# EAGLE board SparkX_smol_Power_AAA-Panel (EAGLE 9.6.2), part 1 of 13
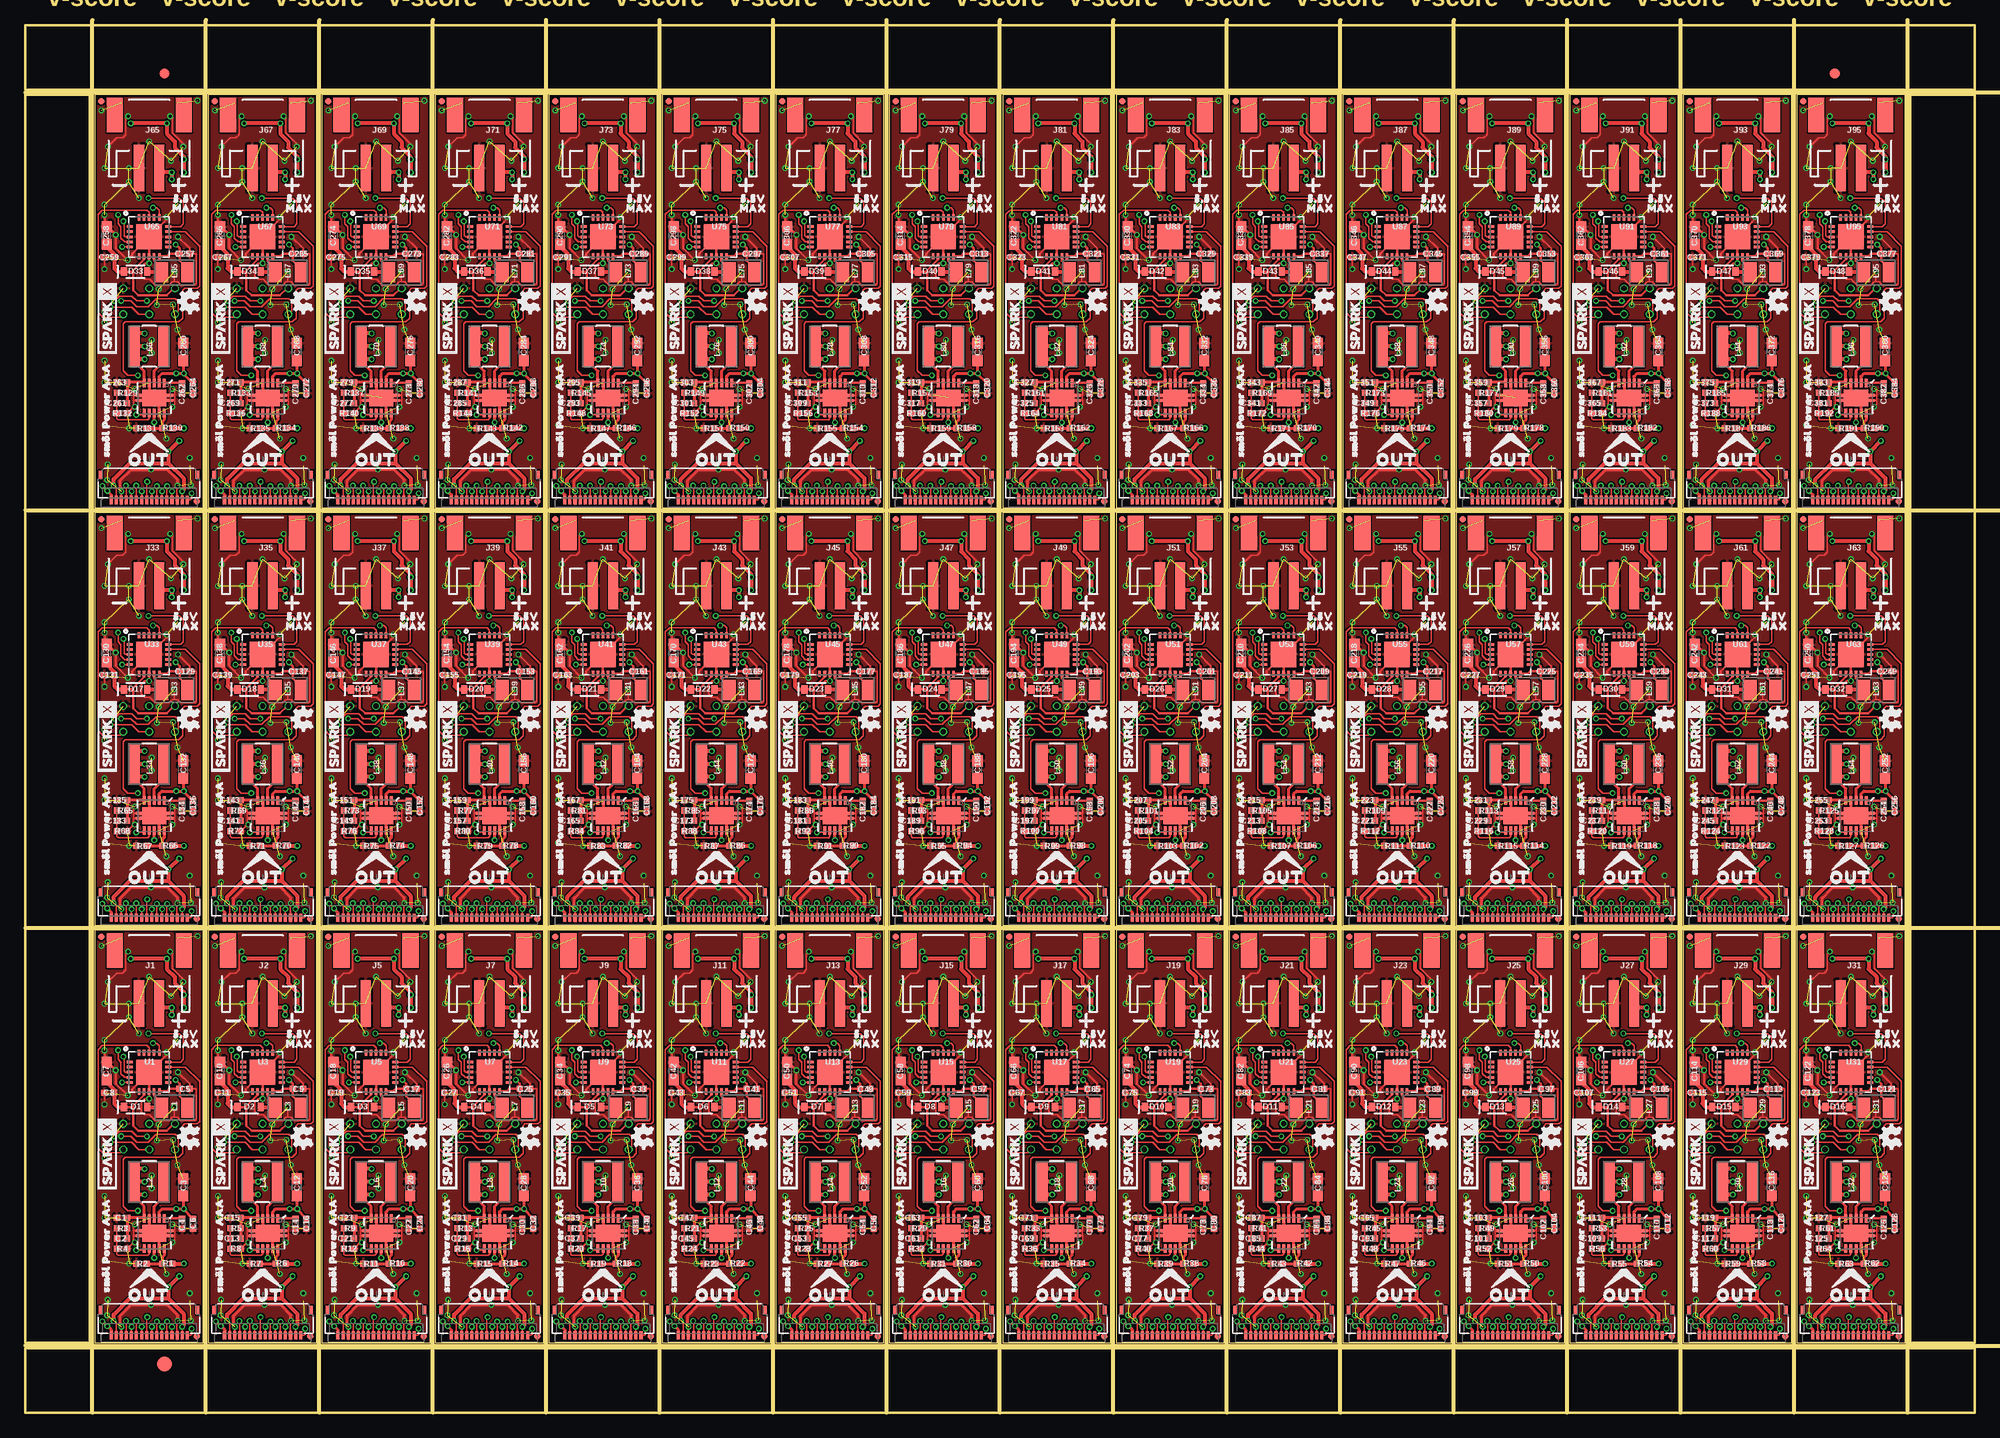
[diagram p0: board, top side]
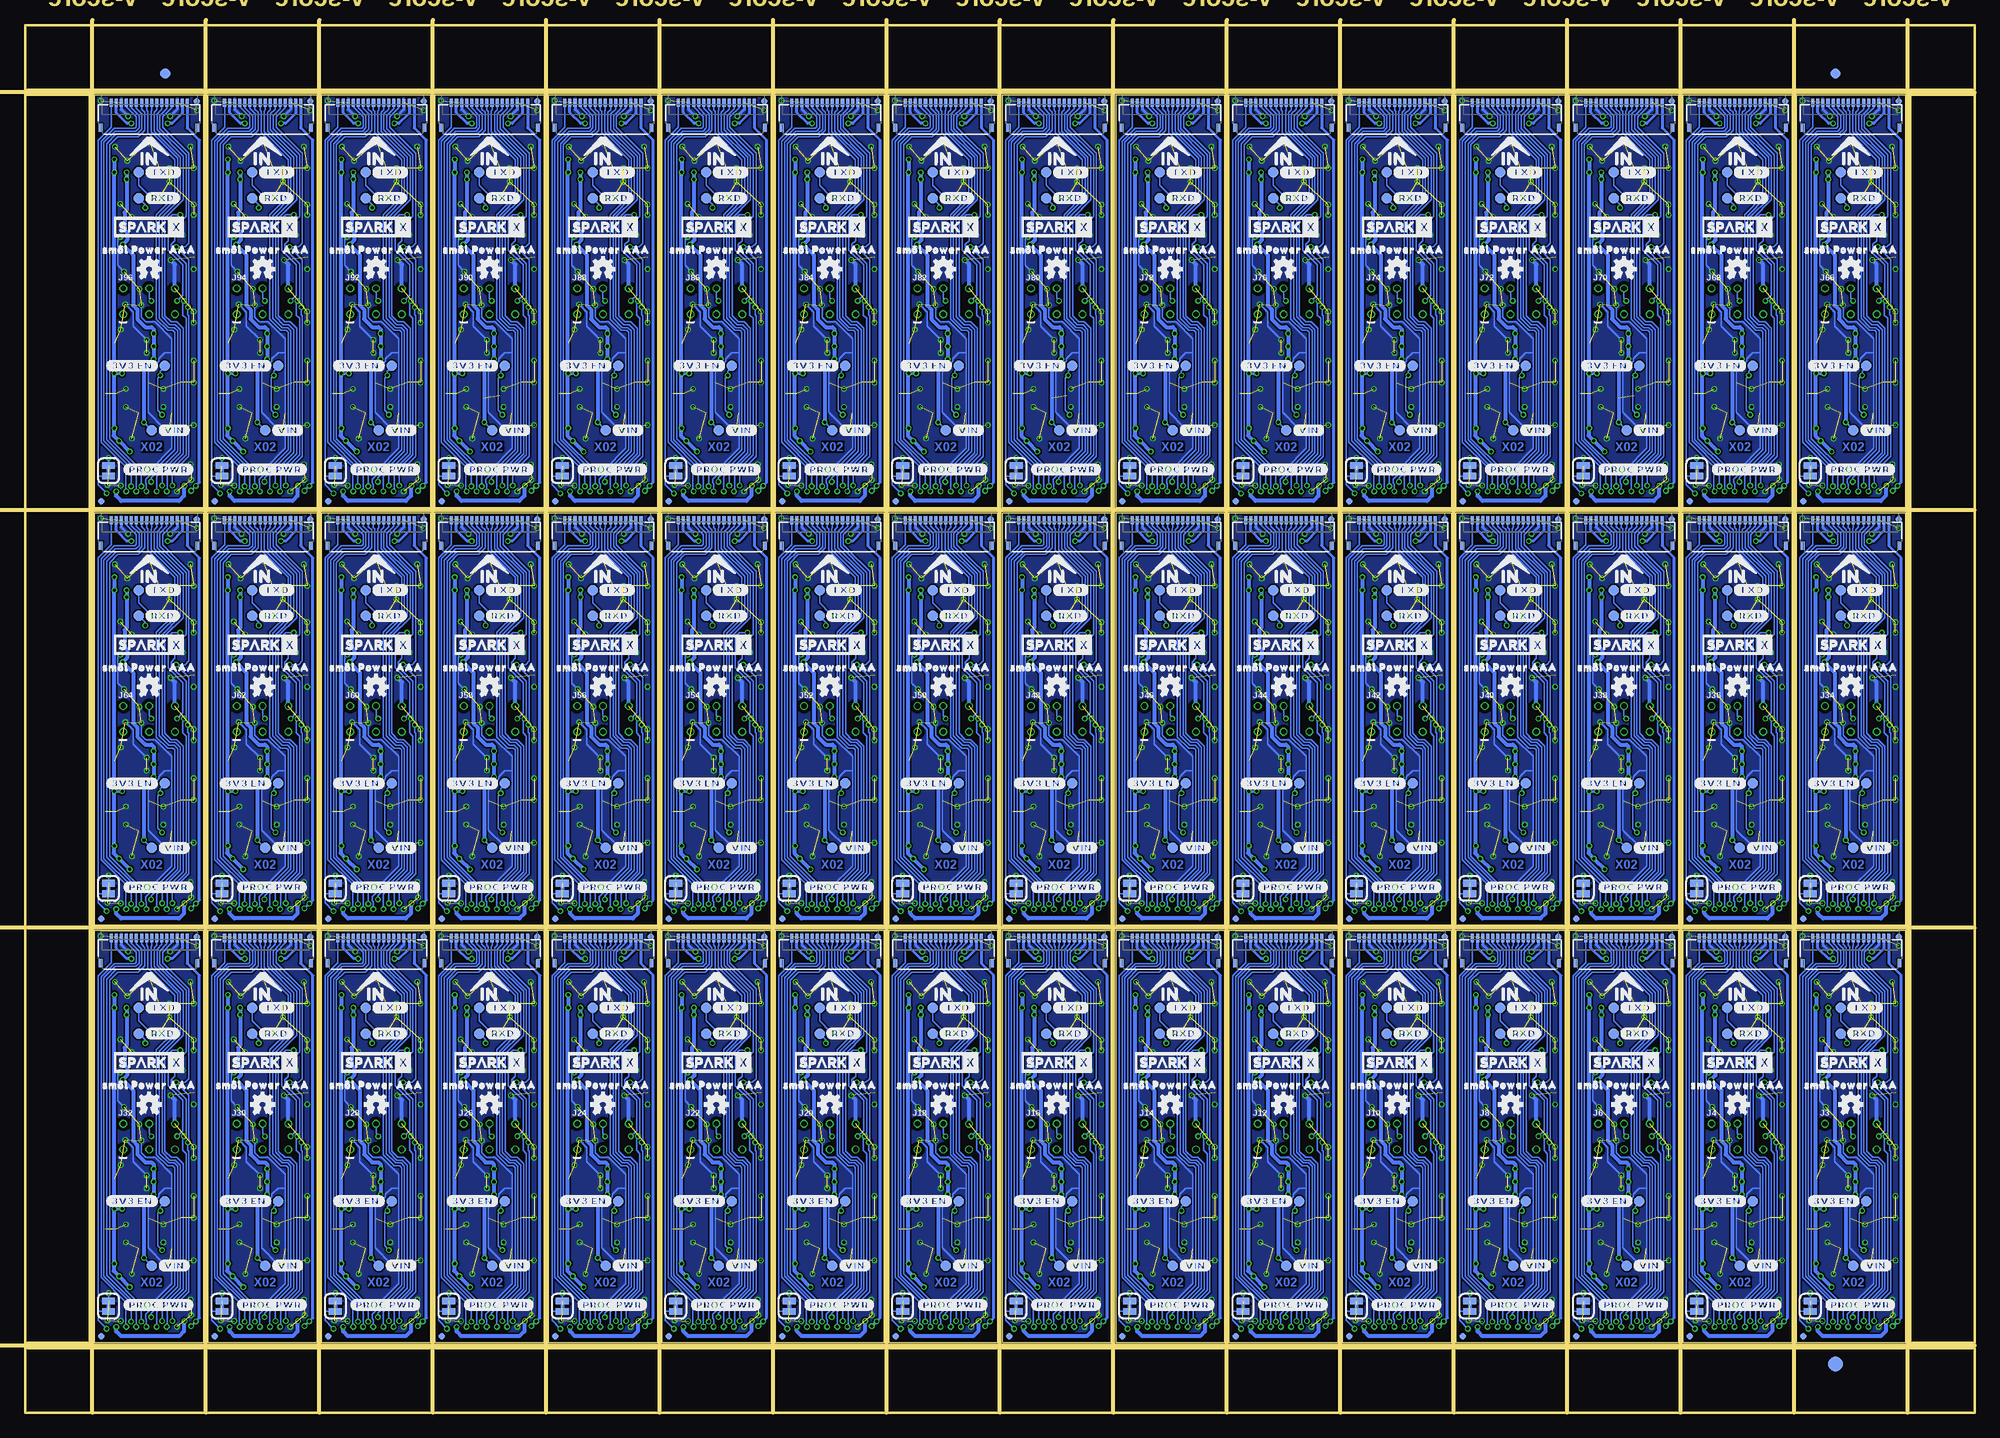
[diagram p1: board, bottom side, seen from below]

Size 192.02 x 136.65 mm. Coordinates in mm from the lower left corner, seen from the top.
Outline: 208 segments
Copper layers (1*16): Top 0.035mm / dielectric 1.5mm / Bottom 0.035mm
Design rules "SparkX_smol_Power_AAA": minimum track width 5mil, minimum drill 0.3mm, track to track 5mil, track to pad 5mil, pad to pad 5mil, via to via 5mil, smd to smd 5mil, copper to edge 7mil, drill to drill 7mil, minimum pad ring 5mil, minimum via ring 5mil, stop-mask expansion 2.5mil, vias tented up to drill 25mil, thermal gap 10mil
bRestrict: area 9.1,27.9 to 10.2,29; area 11.7,27.9 to 12.7,29; area 14.2,27.9 to 15.2,29; area 14.2,25.4 to 15.2,26.4; area 11.7,25.4 to 12.7,26.4; area 9.1,25.4 to 10.2,26.4; area 20.3,27.9 to 21.3,29; area 22.9,27.9 to 23.9,29; area 25.4,27.9 to 26.4,29; area 25.4,25.4 to 26.4,26.4; area 22.9,25.4 to 23.9,26.4; area 20.3,25.4 to 21.3,26.4; 276 more areas
Milling: 21 lines

## Footprints (pad centres in the part's own frame; a part is rotated, then mirrored left to right if it is on the bottom)
PAD.03X.04 = smd 1.016 x 1.016: 1 0,0
0402-TIGHT = smd 0.6 x 0.6: 1 -0.5,0; 2 0.5,0
0603 = smd 1.1 x 1: 1 -0.85,0; 2 0.85,0
SOD-323 = smd 0.63 x 0.83: A 1.15,0; C -1.15,0
FIDUCIAL-1X2 = smd 1 x 1: 1 0,0
FIDUCIAL-1.5X3 = smd 1.5 x 1.5: 1 0,0
FIDUCIAL-MICRO = smd 0.635 x 0.635: 1 0,0
FPC_16_0.5MM = smd 0.3 x 0.8: 1 -3.75,1.35; 2 -3.25,1.35; 3 -2.75,1.35; 4 -2.25,1.35; 5 -1.75,1.35; 6 -1.25,1.35; 7 -0.75,1.35; 8 -0.25,1.35; 9 0.25,1.35; 10 0.75,1.35; 11 1.25,1.35; 12 1.75,1.35; 13 2.25,1.35; 14 2.75,1.35; 15 3.25,1.35; 16 3.75,1.35 | smd 0.4 x 0.8: MP1 -4.75,-1.15; MP2 4.75,-1.15
JST-2-SMD = smd 1 x 4.6: 1 -1,-3.7; 2 1,-3.7 | smd 1.6 x 3.4: NC1 -3.4,1.5; NC2 3.4,1.5
2X3_TEST_POINTS = drill 0.508: 1 -2.54,-1.27; 2 -2.54,1.27; 3 0,-1.27; 4 0,1.27; 5 2.54,-1.27; 6 2.54,1.27
INDUCTOR_LQH32 = smd 2 x 1.25: P$1 -0.07,1.205; P$2 -0.07,-1.295
INDUCTOR_4X4MM = smd 4.089 x 1.143: P$1 0,1.473; P$2 0,-1.473
SMT-JUMPER_2_NC_TRACE_SILK = smd 0.66 x 1.27: 1 -0.521,0; 2 0.521,0
QFN20_20M1 = smd 0.6 x 0.25: 1 -1.9,1; 2 -1.9,0.5; 3 -1.9,0; 4 -1.9,-0.5; 5 -1.9,-1; 11 1.9,-1; 12 1.9,-0.5; 13 1.9,0; 14 1.9,0.5; 15 1.9,1 | smd 0.25 x 0.6: 6 -1,-1.9; 7 -0.5,-1.9; 8 0,-1.9; 9 0.5,-1.9; 10 1,-1.9; 16 1,1.9; 17 0.5,1.9; 18 0,1.9; 19 -0.5,1.9; 20 -1,1.9 | smd 2.5 x 2.5: PAD 0,0
QFN-10_PAD = smd 0.297 x 0.85: 1 -1,-1.475; 2 -0.5,-1.475; 3 0,-1.475; 4 0.5,-1.475; 5 1,-1.475; 6 1,1.475; 7 0.5,1.475; 8 0,1.475; 9 -0.5,1.475; 10 -1,1.475 | smd 0.7 x 0.28: 11 -1.5,0.25; 12 -1.5,-0.25; 13 1.5,0.25; 14 1.5,-0.25 | smd 2.4 x 1.65: 15 0,0

## Placement (x,y rotation side)
3V3_EN  TEST-POINT3X4  [PAD.03X.04]  10.67,20.83 0 bottom
3V3_EN1  TEST-POINT3X4  [PAD.03X.04]  21.84,20.83 0 bottom
3V3_EN2  TEST-POINT3X4  [PAD.03X.04]  33.02,20.83 0 bottom
3V3_EN3  TEST-POINT3X4  [PAD.03X.04]  44.2,20.83 0 bottom
3V3_EN4  TEST-POINT3X4  [PAD.03X.04]  55.37,20.83 0 bottom
3V3_EN5  TEST-POINT3X4  [PAD.03X.04]  66.55,20.83 0 bottom
3V3_EN6  TEST-POINT3X4  [PAD.03X.04]  77.72,20.83 0 bottom
3V3_EN7  TEST-POINT3X4  [PAD.03X.04]  88.9,20.83 0 bottom
3V3_EN8  TEST-POINT3X4  [PAD.03X.04]  100.08,20.83 0 bottom
3V3_EN9  TEST-POINT3X4  [PAD.03X.04]  111.25,20.83 0 bottom
3V3_EN10  TEST-POINT3X4  [PAD.03X.04]  122.43,20.83 0 bottom
3V3_EN11  TEST-POINT3X4  [PAD.03X.04]  133.6,20.83 0 bottom
3V3_EN12  TEST-POINT3X4  [PAD.03X.04]  144.78,20.83 0 bottom
3V3_EN13  TEST-POINT3X4  [PAD.03X.04]  155.96,20.83 0 bottom
3V3_EN14  TEST-POINT3X4  [PAD.03X.04]  167.13,20.83 0 bottom
3V3_EN15  TEST-POINT3X4  [PAD.03X.04]  178.31,20.83 0 bottom
3V3_EN16  TEST-POINT3X4  [PAD.03X.04]  10.67,61.98 0 bottom
3V3_EN17  TEST-POINT3X4  [PAD.03X.04]  21.84,61.98 0 bottom
3V3_EN18  TEST-POINT3X4  [PAD.03X.04]  33.02,61.98 0 bottom
3V3_EN19  TEST-POINT3X4  [PAD.03X.04]  44.2,61.98 0 bottom
3V3_EN20  TEST-POINT3X4  [PAD.03X.04]  55.37,61.98 0 bottom
3V3_EN21  TEST-POINT3X4  [PAD.03X.04]  66.55,61.98 0 bottom
3V3_EN22  TEST-POINT3X4  [PAD.03X.04]  77.72,61.98 0 bottom
3V3_EN23  TEST-POINT3X4  [PAD.03X.04]  88.9,61.98 0 bottom
3V3_EN24  TEST-POINT3X4  [PAD.03X.04]  100.08,61.98 0 bottom
3V3_EN25  TEST-POINT3X4  [PAD.03X.04]  111.25,61.98 0 bottom
3V3_EN26  TEST-POINT3X4  [PAD.03X.04]  122.43,61.98 0 bottom
3V3_EN27  TEST-POINT3X4  [PAD.03X.04]  133.6,61.98 0 bottom
3V3_EN28  TEST-POINT3X4  [PAD.03X.04]  144.78,61.98 0 bottom
3V3_EN29  TEST-POINT3X4  [PAD.03X.04]  155.96,61.98 0 bottom
3V3_EN30  TEST-POINT3X4  [PAD.03X.04]  167.13,61.98 0 bottom
3V3_EN31  TEST-POINT3X4  [PAD.03X.04]  178.31,61.98 0 bottom
3V3_EN32  TEST-POINT3X4  [PAD.03X.04]  10.67,103.12 0 bottom
3V3_EN33  TEST-POINT3X4  [PAD.03X.04]  21.84,103.12 0 bottom
3V3_EN34  TEST-POINT3X4  [PAD.03X.04]  33.02,103.12 0 bottom
3V3_EN35  TEST-POINT3X4  [PAD.03X.04]  44.2,103.12 0 bottom
3V3_EN36  TEST-POINT3X4  [PAD.03X.04]  55.37,103.12 0 bottom
3V3_EN37  TEST-POINT3X4  [PAD.03X.04]  66.55,103.12 0 bottom
3V3_EN38  TEST-POINT3X4  [PAD.03X.04]  77.72,103.12 0 bottom
3V3_EN39  TEST-POINT3X4  [PAD.03X.04]  88.9,103.12 0 bottom
3V3_EN40  TEST-POINT3X4  [PAD.03X.04]  100.08,103.12 0 bottom
3V3_EN41  TEST-POINT3X4  [PAD.03X.04]  111.25,103.12 0 bottom
3V3_EN42  TEST-POINT3X4  [PAD.03X.04]  122.43,103.12 0 bottom
3V3_EN43  TEST-POINT3X4  [PAD.03X.04]  133.6,103.12 0 bottom
3V3_EN44  TEST-POINT3X4  [PAD.03X.04]  144.78,103.12 0 bottom
3V3_EN45  TEST-POINT3X4  [PAD.03X.04]  155.96,103.12 0 bottom
3V3_EN46  TEST-POINT3X4  [PAD.03X.04]  167.13,103.12 0 bottom
3V3_EN47  TEST-POINT3X4  [PAD.03X.04]  178.31,103.12 0 bottom
C1  10uF  [0402-TIGHT]  9.52,19.18 180 top
C2  0.1uF  [0402-TIGHT]  9.52,17.14 180 top
C3  22uF  [0603]  15.56,22.19 90 top
C4  0.1uF  [0402-TIGHT]  15.43,18.61 270 top
C5  4.7uF  [0402-TIGHT]  15.68,31.88 0 top
C6  0.1uF  [0402-TIGHT]  16.51,18.61 270 top
C7  22uF  [0603]  8,33.66 90 top
C8  0.1uF  [0402-TIGHT]  8.25,31.5 180 top
C9  4.7uF  [0402-TIGHT]  26.86,31.88 0 top
C10  22uF  [0603]  19.18,33.66 90 top
C11  0.1uF  [0402-TIGHT]  19.43,31.5 180 top
C12  22uF  [0603]  26.73,22.19 90 top
C13  0.1uF  [0402-TIGHT]  20.7,17.14 180 top
C14  0.1uF  [0402-TIGHT]  26.61,18.61 270 top
C15  10uF  [0402-TIGHT]  20.7,19.18 180 top
C16  0.1uF  [0402-TIGHT]  27.69,18.61 270 top
C17  4.7uF  [0402-TIGHT]  38.04,31.88 0 top
C18  22uF  [0603]  30.35,33.66 90 top
C19  0.1uF  [0402-TIGHT]  30.61,31.5 180 top
C20  22uF  [0603]  37.91,22.19 90 top
C21  0.1uF  [0402-TIGHT]  31.88,17.14 180 top
C22  0.1uF  [0402-TIGHT]  37.78,18.61 270 top
C23  10uF  [0402-TIGHT]  31.88,19.18 180 top
C24  0.1uF  [0402-TIGHT]  38.86,18.61 270 top
C25  4.7uF  [0402-TIGHT]  49.21,31.88 0 top
C26  22uF  [0603]  41.53,33.66 90 top
C27  0.1uF  [0402-TIGHT]  41.78,31.5 180 top
C28  22uF  [0603]  49.09,22.19 90 top
C29  0.1uF  [0402-TIGHT]  43.05,17.14 180 top
C30  0.1uF  [0402-TIGHT]  48.96,18.61 270 top
C31  10uF  [0402-TIGHT]  43.05,19.18 180 top
C32  0.1uF  [0402-TIGHT]  50.04,18.61 270 top
C33  4.7uF  [0402-TIGHT]  60.39,31.88 0 top
C34  22uF  [0603]  52.7,33.66 90 top
C35  0.1uF  [0402-TIGHT]  52.96,31.5 180 top
C36  22uF  [0603]  60.26,22.19 90 top
C37  0.1uF  [0402-TIGHT]  54.23,17.14 180 top
C38  0.1uF  [0402-TIGHT]  60.13,18.61 270 top
C39  10uF  [0402-TIGHT]  54.23,19.18 180 top
C40  0.1uF  [0402-TIGHT]  61.21,18.61 270 top
C41  4.7uF  [0402-TIGHT]  71.56,31.88 0 top
C42  22uF  [0603]  63.88,33.66 90 top
C43  0.1uF  [0402-TIGHT]  64.14,31.5 180 top
C44  22uF  [0603]  71.44,22.19 90 top
C45  0.1uF  [0402-TIGHT]  65.41,17.14 180 top
C46  0.1uF  [0402-TIGHT]  71.31,18.61 270 top
C47  10uF  [0402-TIGHT]  65.41,19.18 180 top
C48  0.1uF  [0402-TIGHT]  72.39,18.61 270 top
C49  4.7uF  [0402-TIGHT]  82.74,31.88 0 top
C50  22uF  [0603]  75.06,33.66 90 top
C51  0.1uF  [0402-TIGHT]  75.31,31.5 180 top
C52  22uF  [0603]  82.61,22.19 90 top
C53  0.1uF  [0402-TIGHT]  76.58,17.14 180 top
C54  0.1uF  [0402-TIGHT]  82.49,18.61 270 top
C55  10uF  [0402-TIGHT]  76.58,19.18 180 top
C56  0.1uF  [0402-TIGHT]  83.57,18.61 270 top
C57  4.7uF  [0402-TIGHT]  93.92,31.88 0 top
C58  22uF  [0603]  86.23,33.66 90 top
C59  0.1uF  [0402-TIGHT]  86.49,31.5 180 top
C60  22uF  [0603]  93.79,22.19 90 top
C61  0.1uF  [0402-TIGHT]  87.76,17.14 180 top
C62  0.1uF  [0402-TIGHT]  93.66,18.61 270 top
C63  10uF  [0402-TIGHT]  87.76,19.18 180 top
C64  0.1uF  [0402-TIGHT]  94.74,18.61 270 top
C65  4.7uF  [0402-TIGHT]  105.09,31.88 0 top
C66  22uF  [0603]  97.41,33.66 90 top
C67  0.1uF  [0402-TIGHT]  97.66,31.5 180 top
C68  22uF  [0603]  104.97,22.19 90 top
C69  0.1uF  [0402-TIGHT]  98.93,17.14 180 top
C70  0.1uF  [0402-TIGHT]  104.84,18.61 270 top
C71  10uF  [0402-TIGHT]  98.93,19.18 180 top
C72  0.1uF  [0402-TIGHT]  105.92,18.61 270 top
C73  4.7uF  [0402-TIGHT]  116.27,31.88 0 top
C74  22uF  [0603]  108.59,33.66 90 top
C75  0.1uF  [0402-TIGHT]  108.84,31.5 180 top
C76  22uF  [0603]  116.14,22.19 90 top
C77  0.1uF  [0402-TIGHT]  110.11,17.14 180 top
C78  0.1uF  [0402-TIGHT]  116.01,18.61 270 top
C79  10uF  [0402-TIGHT]  110.11,19.18 180 top
C80  0.1uF  [0402-TIGHT]  117.09,18.61 270 top
C81  4.7uF  [0402-TIGHT]  127.44,31.88 0 top
C82  22uF  [0603]  119.76,33.66 90 top
C83  0.1uF  [0402-TIGHT]  120.02,31.5 180 top
C84  22uF  [0603]  127.32,22.19 90 top
C85  0.1uF  [0402-TIGHT]  121.29,17.14 180 top
C86  0.1uF  [0402-TIGHT]  127.19,18.61 270 top
C87  10uF  [0402-TIGHT]  121.29,19.18 180 top
C88  0.1uF  [0402-TIGHT]  128.27,18.61 270 top
C89  4.7uF  [0402-TIGHT]  138.62,31.88 0 top
C90  22uF  [0603]  130.94,33.66 90 top
C91  0.1uF  [0402-TIGHT]  131.19,31.5 180 top
C92  22uF  [0603]  138.49,22.19 90 top
C93  0.1uF  [0402-TIGHT]  132.46,17.14 180 top
C94  0.1uF  [0402-TIGHT]  138.37,18.61 270 top
C95  10uF  [0402-TIGHT]  132.46,19.18 180 top
C96  0.1uF  [0402-TIGHT]  139.45,18.61 270 top
C97  4.7uF  [0402-TIGHT]  149.8,31.88 0 top
C98  22uF  [0603]  142.11,33.66 90 top
C99  0.1uF  [0402-TIGHT]  142.37,31.5 180 top
C100  22uF  [0603]  149.67,22.19 90 top
C101  0.1uF  [0402-TIGHT]  143.64,17.14 180 top
C102  0.1uF  [0402-TIGHT]  149.54,18.61 270 top
C103  10uF  [0402-TIGHT]  143.64,19.18 180 top
C104  0.1uF  [0402-TIGHT]  150.62,18.61 270 top
C105  4.7uF  [0402-TIGHT]  160.97,31.88 0 top
C106  22uF  [0603]  153.29,33.66 90 top
C107  0.1uF  [0402-TIGHT]  153.54,31.5 180 top
C108  22uF  [0603]  160.85,22.19 90 top
C109  0.1uF  [0402-TIGHT]  154.81,17.14 180 top
C110  0.1uF  [0402-TIGHT]  160.72,18.61 270 top
C111  10uF  [0402-TIGHT]  154.81,19.18 180 top
C112  0.1uF  [0402-TIGHT]  161.8,18.61 270 top
C113  4.7uF  [0402-TIGHT]  172.15,31.88 0 top
C114  22uF  [0603]  164.47,33.66 90 top
C115  0.1uF  [0402-TIGHT]  164.72,31.5 180 top
C116  22uF  [0603]  172.02,22.19 90 top
C117  0.1uF  [0402-TIGHT]  165.99,17.14 180 top
C118  0.1uF  [0402-TIGHT]  171.89,18.61 270 top
C119  10uF  [0402-TIGHT]  165.99,19.18 180 top
C120  0.1uF  [0402-TIGHT]  172.97,18.61 270 top
C121  4.7uF  [0402-TIGHT]  183.32,31.88 0 top
C122  22uF  [0603]  175.64,33.66 90 top
C123  0.1uF  [0402-TIGHT]  175.9,31.5 180 top
C124  22uF  [0603]  183.2,22.19 90 top
C125  0.1uF  [0402-TIGHT]  177.16,17.14 180 top
C126  0.1uF  [0402-TIGHT]  183.07,18.61 270 top
C127  10uF  [0402-TIGHT]  177.16,19.18 180 top
C128  0.1uF  [0402-TIGHT]  184.15,18.61 270 top
C129  4.7uF  [0402-TIGHT]  15.68,73.03 0 top
C130  22uF  [0603]  8,74.8 90 top
C131  0.1uF  [0402-TIGHT]  8.25,72.64 180 top
C132  22uF  [0603]  15.56,63.34 90 top
C133  0.1uF  [0402-TIGHT]  9.52,58.29 180 top
C134  0.1uF  [0402-TIGHT]  15.43,59.75 270 top
C135  10uF  [0402-TIGHT]  9.52,60.32 180 top
C136  0.1uF  [0402-TIGHT]  16.51,59.75 270 top
C137  4.7uF  [0402-TIGHT]  26.86,73.03 0 top
C138  22uF  [0603]  19.18,74.8 90 top
C139  0.1uF  [0402-TIGHT]  19.43,72.64 180 top
C140  22uF  [0603]  26.73,63.34 90 top
C141  0.1uF  [0402-TIGHT]  20.7,58.29 180 top
C142  0.1uF  [0402-TIGHT]  26.61,59.75 270 top
C143  10uF  [0402-TIGHT]  20.7,60.32 180 top
C144  0.1uF  [0402-TIGHT]  27.69,59.75 270 top
C145  4.7uF  [0402-TIGHT]  38.04,73.03 0 top
C146  22uF  [0603]  30.35,74.8 90 top
C147  0.1uF  [0402-TIGHT]  30.61,72.64 180 top
C148  22uF  [0603]  37.91,63.34 90 top
C149  0.1uF  [0402-TIGHT]  31.88,58.29 180 top
C150  0.1uF  [0402-TIGHT]  37.78,59.75 270 top
C151  10uF  [0402-TIGHT]  31.88,60.32 180 top
C152  0.1uF  [0402-TIGHT]  38.86,59.75 270 top
C153  4.7uF  [0402-TIGHT]  49.21,73.03 0 top
C154  22uF  [0603]  41.53,74.8 90 top
C155  0.1uF  [0402-TIGHT]  41.78,72.64 180 top
C156  22uF  [0603]  49.09,63.34 90 top
C157  0.1uF  [0402-TIGHT]  43.05,58.29 180 top
C158  0.1uF  [0402-TIGHT]  48.96,59.75 270 top
C159  10uF  [0402-TIGHT]  43.05,60.32 180 top
C160  0.1uF  [0402-TIGHT]  50.04,59.75 270 top
C161  4.7uF  [0402-TIGHT]  60.39,73.03 0 top
C162  22uF  [0603]  52.7,74.8 90 top
C163  0.1uF  [0402-TIGHT]  52.96,72.64 180 top
C164  22uF  [0603]  60.26,63.34 90 top
C165  0.1uF  [0402-TIGHT]  54.23,58.29 180 top
C166  0.1uF  [0402-TIGHT]  60.13,59.75 270 top
C167  10uF  [0402-TIGHT]  54.23,60.32 180 top
C168  0.1uF  [0402-TIGHT]  61.21,59.75 270 top
C169  4.7uF  [0402-TIGHT]  71.56,73.03 0 top
C170  22uF  [0603]  63.88,74.8 90 top
C171  0.1uF  [0402-TIGHT]  64.14,72.64 180 top
C172  22uF  [0603]  71.44,63.34 90 top
C173  0.1uF  [0402-TIGHT]  65.41,58.29 180 top
C174  0.1uF  [0402-TIGHT]  71.31,59.75 270 top
C175  10uF  [0402-TIGHT]  65.41,60.32 180 top
C176  0.1uF  [0402-TIGHT]  72.39,59.75 270 top
C177  4.7uF  [0402-TIGHT]  82.74,73.03 0 top
C178  22uF  [0603]  75.06,74.8 90 top
C179  0.1uF  [0402-TIGHT]  75.31,72.64 180 top
C180  22uF  [0603]  82.61,63.34 90 top
C181  0.1uF  [0402-TIGHT]  76.58,58.29 180 top
C182  0.1uF  [0402-TIGHT]  82.49,59.75 270 top
C183  10uF  [0402-TIGHT]  76.58,60.32 180 top
C184  0.1uF  [0402-TIGHT]  83.57,59.75 270 top
C185  4.7uF  [0402-TIGHT]  93.92,73.03 0 top
C186  22uF  [0603]  86.23,74.8 90 top
C187  0.1uF  [0402-TIGHT]  86.49,72.64 180 top
C188  22uF  [0603]  93.79,63.34 90 top
C189  0.1uF  [0402-TIGHT]  87.76,58.29 180 top
C190  0.1uF  [0402-TIGHT]  93.66,59.75 270 top
C191  10uF  [0402-TIGHT]  87.76,60.32 180 top
C192  0.1uF  [0402-TIGHT]  94.74,59.75 270 top
C193  4.7uF  [0402-TIGHT]  105.09,73.03 0 top
C194  22uF  [0603]  97.41,74.8 90 top
C195  0.1uF  [0402-TIGHT]  97.66,72.64 180 top
C196  22uF  [0603]  104.97,63.34 90 top
C197  0.1uF  [0402-TIGHT]  98.93,58.29 180 top
C198  0.1uF  [0402-TIGHT]  104.84,59.75 270 top
C199  10uF  [0402-TIGHT]  98.93,60.32 180 top
C200  0.1uF  [0402-TIGHT]  105.92,59.75 270 top
C201  4.7uF  [0402-TIGHT]  116.27,73.03 0 top
C202  22uF  [0603]  108.59,74.8 90 top
C203  0.1uF  [0402-TIGHT]  108.84,72.64 180 top
C204  22uF  [0603]  116.14,63.34 90 top
C205  0.1uF  [0402-TIGHT]  110.11,58.29 180 top
C206  0.1uF  [0402-TIGHT]  116.01,59.75 270 top
C207  10uF  [0402-TIGHT]  110.11,60.32 180 top
C208  0.1uF  [0402-TIGHT]  117.09,59.75 270 top
C209  4.7uF  [0402-TIGHT]  127.44,73.03 0 top
C210  22uF  [0603]  119.76,74.8 90 top
C211  0.1uF  [0402-TIGHT]  120.02,72.64 180 top
C212  22uF  [0603]  127.32,63.34 90 top
C213  0.1uF  [0402-TIGHT]  121.29,58.29 180 top
C214  0.1uF  [0402-TIGHT]  127.19,59.75 270 top
C215  10uF  [0402-TIGHT]  121.29,60.32 180 top
C216  0.1uF  [0402-TIGHT]  128.27,59.75 270 top
C217  4.7uF  [0402-TIGHT]  138.62,73.03 0 top
C218  22uF  [0603]  130.94,74.8 90 top
C219  0.1uF  [0402-TIGHT]  131.19,72.64 180 top
C220  22uF  [0603]  138.49,63.34 90 top
C221  0.1uF  [0402-TIGHT]  132.46,58.29 180 top
C222  0.1uF  [0402-TIGHT]  138.37,59.75 270 top
C223  10uF  [0402-TIGHT]  132.46,60.32 180 top
C224  0.1uF  [0402-TIGHT]  139.45,59.75 270 top
C225  4.7uF  [0402-TIGHT]  149.8,73.03 0 top
C226  22uF  [0603]  142.11,74.8 90 top
C227  0.1uF  [0402-TIGHT]  142.37,72.64 180 top
C228  22uF  [0603]  149.67,63.34 90 top
C229  0.1uF  [0402-TIGHT]  143.64,58.29 180 top
C230  0.1uF  [0402-TIGHT]  149.54,59.75 270 top
C231  10uF  [0402-TIGHT]  143.64,60.32 180 top
C232  0.1uF  [0402-TIGHT]  150.62,59.75 270 top
C233  4.7uF  [0402-TIGHT]  160.97,73.03 0 top
C234  22uF  [0603]  153.29,74.8 90 top
C235  0.1uF  [0402-TIGHT]  153.54,72.64 180 top
C236  22uF  [0603]  160.85,63.34 90 top
C237  0.1uF  [0402-TIGHT]  154.81,58.29 180 top
C238  0.1uF  [0402-TIGHT]  160.72,59.75 270 top
C239  10uF  [0402-TIGHT]  154.81,60.32 180 top
C240  0.1uF  [0402-TIGHT]  161.8,59.75 270 top
C241  4.7uF  [0402-TIGHT]  172.15,73.03 0 top
C242  22uF  [0603]  164.47,74.8 90 top
C243  0.1uF  [0402-TIGHT]  164.72,72.64 180 top
C244  22uF  [0603]  172.02,63.34 90 top
C245  0.1uF  [0402-TIGHT]  165.99,58.29 180 top
C246  0.1uF  [0402-TIGHT]  171.89,59.75 270 top
C247  10uF  [0402-TIGHT]  165.99,60.32 180 top
C248  0.1uF  [0402-TIGHT]  172.97,59.75 270 top
C249  4.7uF  [0402-TIGHT]  183.32,73.03 0 top
C250  22uF  [0603]  175.64,74.8 90 top
C251  0.1uF  [0402-TIGHT]  175.9,72.64 180 top
C252  22uF  [0603]  183.2,63.34 90 top
C253  0.1uF  [0402-TIGHT]  177.16,58.29 180 top
C254  0.1uF  [0402-TIGHT]  183.07,59.75 270 top
C255  10uF  [0402-TIGHT]  177.16,60.32 180 top
C256  0.1uF  [0402-TIGHT]  184.15,59.75 270 top
C257  4.7uF  [0402-TIGHT]  15.68,114.17 0 top
C258  22uF  [0603]  8,115.95 90 top
C259  0.1uF  [0402-TIGHT]  8.25,113.79 180 top
C260  22uF  [0603]  15.56,104.49 90 top
C261  0.1uF  [0402-TIGHT]  9.52,99.44 180 top
C262  0.1uF  [0402-TIGHT]  15.43,100.9 270 top
C263  10uF  [0402-TIGHT]  9.52,101.47 180 top
C264  0.1uF  [0402-TIGHT]  16.51,100.9 270 top
C265  4.7uF  [0402-TIGHT]  26.86,114.17 0 top
C266  22uF  [0603]  19.18,115.95 90 top
C267  0.1uF  [0402-TIGHT]  19.43,113.79 180 top
C268  22uF  [0603]  26.73,104.49 90 top
C269  0.1uF  [0402-TIGHT]  20.7,99.44 180 top
C270  0.1uF  [0402-TIGHT]  26.61,100.9 270 top
C271  10uF  [0402-TIGHT]  20.7,101.47 180 top
C272  0.1uF  [0402-TIGHT]  27.69,100.9 270 top
C273  4.7uF  [0402-TIGHT]  38.04,114.17 0 top
C274  22uF  [0603]  30.35,115.95 90 top
C275  0.1uF  [0402-TIGHT]  30.61,113.79 180 top
C276  22uF  [0603]  37.91,104.49 90 top
C277  0.1uF  [0402-TIGHT]  31.88,99.44 180 top
C278  0.1uF  [0402-TIGHT]  37.78,100.9 270 top
C279  10uF  [0402-TIGHT]  31.88,101.47 180 top
C280  0.1uF  [0402-TIGHT]  38.86,100.9 270 top
C281  4.7uF  [0402-TIGHT]  49.21,114.17 0 top
C282  22uF  [0603]  41.53,115.95 90 top
C283  0.1uF  [0402-TIGHT]  41.78,113.79 180 top
C284  22uF  [0603]  49.09,104.49 90 top
C285  0.1uF  [0402-TIGHT]  43.05,99.44 180 top
C286  0.1uF  [0402-TIGHT]  48.96,100.9 270 top
C287  10uF  [0402-TIGHT]  43.05,101.47 180 top
C288  0.1uF  [0402-TIGHT]  50.04,100.9 270 top
C289  4.7uF  [0402-TIGHT]  60.39,114.17 0 top
C290  22uF  [0603]  52.7,115.95 90 top
C291  0.1uF  [0402-TIGHT]  52.96,113.79 180 top
C292  22uF  [0603]  60.26,104.49 90 top
C293  0.1uF  [0402-TIGHT]  54.23,99.44 180 top
C294  0.1uF  [0402-TIGHT]  60.13,100.9 270 top
C295  10uF  [0402-TIGHT]  54.23,101.47 180 top
C296  0.1uF  [0402-TIGHT]  61.21,100.9 270 top
C297  4.7uF  [0402-TIGHT]  71.56,114.17 0 top
C298  22uF  [0603]  63.88,115.95 90 top
C299  0.1uF  [0402-TIGHT]  64.14,113.79 180 top
C300  22uF  [0603]  71.44,104.49 90 top
C301  0.1uF  [0402-TIGHT]  65.41,99.44 180 top
C302  0.1uF  [0402-TIGHT]  71.31,100.9 270 top
C303  10uF  [0402-TIGHT]  65.41,101.47 180 top
C304  0.1uF  [0402-TIGHT]  72.39,100.9 270 top
C305  4.7uF  [0402-TIGHT]  82.74,114.17 0 top
C306  22uF  [0603]  75.06,115.95 90 top
C307  0.1uF  [0402-TIGHT]  75.31,113.79 180 top
C308  22uF  [0603]  82.61,104.49 90 top
C309  0.1uF  [0402-TIGHT]  76.58,99.44 180 top
C310  0.1uF  [0402-TIGHT]  82.49,100.9 270 top
C311  10uF  [0402-TIGHT]  76.58,101.47 180 top
C312  0.1uF  [0402-TIGHT]  83.57,100.9 270 top
C313  4.7uF  [0402-TIGHT]  93.92,114.17 0 top
C314  22uF  [0603]  86.23,115.95 90 top
C315  0.1uF  [0402-TIGHT]  86.49,113.79 180 top
C316  22uF  [0603]  93.79,104.49 90 top
C317  0.1uF  [0402-TIGHT]  87.76,99.44 180 top
C318  0.1uF  [0402-TIGHT]  93.66,100.9 270 top
C319  10uF  [0402-TIGHT]  87.76,101.47 180 top
C320  0.1uF  [0402-TIGHT]  94.74,100.9 270 top
C321  4.7uF  [0402-TIGHT]  105.09,114.17 0 top
C322  22uF  [0603]  97.41,115.95 90 top
C323  0.1uF  [0402-TIGHT]  97.66,113.79 180 top
C324  22uF  [0603]  104.97,104.49 90 top
C325  0.1uF  [0402-TIGHT]  98.93,99.44 180 top
C326  0.1uF  [0402-TIGHT]  104.84,100.9 270 top
C327  10uF  [0402-TIGHT]  98.93,101.47 180 top
C328  0.1uF  [0402-TIGHT]  105.92,100.9 270 top
C329  4.7uF  [0402-TIGHT]  116.27,114.17 0 top
C330  22uF  [0603]  108.59,115.95 90 top
C331  0.1uF  [0402-TIGHT]  108.84,113.79 180 top
C332  22uF  [0603]  116.14,104.49 90 top
C333  0.1uF  [0402-TIGHT]  110.11,99.44 180 top
C334  0.1uF  [0402-TIGHT]  116.01,100.9 270 top
C335  10uF  [0402-TIGHT]  110.11,101.47 180 top
C336  0.1uF  [0402-TIGHT]  117.09,100.9 270 top
C337  4.7uF  [0402-TIGHT]  127.44,114.17 0 top
C338  22uF  [0603]  119.76,115.95 90 top
C339  0.1uF  [0402-TIGHT]  120.02,113.79 180 top
C340  22uF  [0603]  127.32,104.49 90 top
C341  0.1uF  [0402-TIGHT]  121.29,99.44 180 top
C342  0.1uF  [0402-TIGHT]  127.19,100.9 270 top
C343  10uF  [0402-TIGHT]  121.29,101.47 180 top
C344  0.1uF  [0402-TIGHT]  128.27,100.9 270 top
C345  4.7uF  [0402-TIGHT]  138.62,114.17 0 top
C346  22uF  [0603]  130.94,115.95 90 top
C347  0.1uF  [0402-TIGHT]  131.19,113.79 180 top
C348  22uF  [0603]  138.49,104.49 90 top
C349  0.1uF  [0402-TIGHT]  132.46,99.44 180 top
C350  0.1uF  [0402-TIGHT]  138.37,100.9 270 top
C351  10uF  [0402-TIGHT]  132.46,101.47 180 top
C352  0.1uF  [0402-TIGHT]  139.45,100.9 270 top
C353  4.7uF  [0402-TIGHT]  149.8,114.17 0 top
C354  22uF  [0603]  142.11,115.95 90 top
C355  0.1uF  [0402-TIGHT]  142.37,113.79 180 top
C356  22uF  [0603]  149.67,104.49 90 top
C357  0.1uF  [0402-TIGHT]  143.64,99.44 180 top
C358  0.1uF  [0402-TIGHT]  149.54,100.9 270 top
C359  10uF  [0402-TIGHT]  143.64,101.47 180 top
C360  0.1uF  [0402-TIGHT]  150.62,100.9 270 top
C361  4.7uF  [0402-TIGHT]  160.97,114.17 0 top
C362  22uF  [0603]  153.29,115.95 90 top
C363  0.1uF  [0402-TIGHT]  153.54,113.79 180 top
C364  22uF  [0603]  160.85,104.49 90 top
C365  0.1uF  [0402-TIGHT]  154.81,99.44 180 top
C366  0.1uF  [0402-TIGHT]  160.72,100.9 270 top
C367  10uF  [0402-TIGHT]  154.81,101.47 180 top
C368  0.1uF  [0402-TIGHT]  161.8,100.9 270 top
C369  4.7uF  [0402-TIGHT]  172.15,114.17 0 top
C370  22uF  [0603]  164.47,115.95 90 top
C371  0.1uF  [0402-TIGHT]  164.72,113.79 180 top
C372  22uF  [0603]  172.02,104.49 90 top
C373  0.1uF  [0402-TIGHT]  165.99,99.44 180 top
C374  0.1uF  [0402-TIGHT]  171.89,100.9 270 top
C375  10uF  [0402-TIGHT]  165.99,101.47 180 top
C376  0.1uF  [0402-TIGHT]  172.97,100.9 270 top
C377  4.7uF  [0402-TIGHT]  183.32,114.17 0 top
C378  22uF  [0603]  175.64,115.95 90 top
C379  0.1uF  [0402-TIGHT]  175.9,113.79 180 top
C380  22uF  [0603]  183.2,104.49 90 top
C381  0.1uF  [0402-TIGHT]  177.16,99.44 180 top
C382  0.1uF  [0402-TIGHT]  183.07,100.9 270 top
C383  10uF  [0402-TIGHT]  177.16,101.47 180 top
C384  0.1uF  [0402-TIGHT]  184.15,100.9 270 top
D1  1A/23V/620mV  [SOD-323]  10.86,30.1 0 top
D2  1A/23V/620mV  [SOD-323]  22.03,30.1 0 top
D3  1A/23V/620mV  [SOD-323]  33.21,30.1 0 top
D4  1A/23V/620mV  [SOD-323]  44.39,30.1 0 top
D5  1A/23V/620mV  [SOD-323]  55.56,30.1 0 top
D6  1A/23V/620mV  [SOD-323]  66.74,30.1 0 top
D7  1A/23V/620mV  [SOD-323]  77.91,30.1 0 top
D8  1A/23V/620mV  [SOD-323]  89.09,30.1 0 top
D9  1A/23V/620mV  [SOD-323]  100.27,30.1 0 top
D10  1A/23V/620mV  [SOD-323]  111.44,30.1 0 top
D11  1A/23V/620mV  [SOD-323]  122.62,30.1 0 top
D12  1A/23V/620mV  [SOD-323]  133.79,30.1 0 top
D13  1A/23V/620mV  [SOD-323]  144.97,30.1 0 top
D14  1A/23V/620mV  [SOD-323]  156.15,30.1 0 top
D15  1A/23V/620mV  [SOD-323]  167.32,30.1 0 top
D16  1A/23V/620mV  [SOD-323]  178.5,30.1 0 top
D17  1A/23V/620mV  [SOD-323]  10.86,71.25 0 top
D18  1A/23V/620mV  [SOD-323]  22.03,71.25 0 top
D19  1A/23V/620mV  [SOD-323]  33.21,71.25 0 top
D20  1A/23V/620mV  [SOD-323]  44.39,71.25 0 top
D21  1A/23V/620mV  [SOD-323]  55.56,71.25 0 top
D22  1A/23V/620mV  [SOD-323]  66.74,71.25 0 top
D23  1A/23V/620mV  [SOD-323]  77.91,71.25 0 top
D24  1A/23V/620mV  [SOD-323]  89.09,71.25 0 top
D25  1A/23V/620mV  [SOD-323]  100.27,71.25 0 top
D26  1A/23V/620mV  [SOD-323]  111.44,71.25 0 top
D27  1A/23V/620mV  [SOD-323]  122.62,71.25 0 top
D28  1A/23V/620mV  [SOD-323]  133.79,71.25 0 top
D29  1A/23V/620mV  [SOD-323]  144.97,71.25 0 top
D30  1A/23V/620mV  [SOD-323]  156.15,71.25 0 top
D31  1A/23V/620mV  [SOD-323]  167.32,71.25 0 top
D32  1A/23V/620mV  [SOD-323]  178.5,71.25 0 top
D33  1A/23V/620mV  [SOD-323]  10.86,112.4 0 top
D34  1A/23V/620mV  [SOD-323]  22.03,112.4 0 top
D35  1A/23V/620mV  [SOD-323]  33.21,112.4 0 top
D36  1A/23V/620mV  [SOD-323]  44.39,112.4 0 top
D37  1A/23V/620mV  [SOD-323]  55.56,112.4 0 top
D38  1A/23V/620mV  [SOD-323]  66.74,112.4 0 top
D39  1A/23V/620mV  [SOD-323]  77.91,112.4 0 top
D40  1A/23V/620mV  [SOD-323]  89.09,112.4 0 top
D41  1A/23V/620mV  [SOD-323]  100.27,112.4 0 top
D42  1A/23V/620mV  [SOD-323]  111.44,112.4 0 top
D43  1A/23V/620mV  [SOD-323]  122.62,112.4 0 top
D44  1A/23V/620mV  [SOD-323]  133.79,112.4 0 top
D45  1A/23V/620mV  [SOD-323]  144.97,112.4 0 top
D46  1A/23V/620mV  [SOD-323]  156.15,112.4 0 top
D47  1A/23V/620mV  [SOD-323]  167.32,112.4 0 top
D48  1A/23V/620mV  [SOD-323]  178.5,112.4 0 top
E$1  [FIDUCIAL-1X2]  13.72,131.89 0 top
E$2  [FIDUCIAL-1X2]  13.72,131.89 0 bottom
E$3  [FIDUCIAL-1X2]  178.24,131.89 0 top
E$4  [FIDUCIAL-1X2]  178.24,131.89 0 bottom
E$5  [FIDUCIAL-1.5X3]  13.72,4.76 0 top
E$6  [FIDUCIAL-1.5X3]  13.72,4.76 0 bottom
FD1  FIDUCIALUFIDUCIAL  [FIDUCIAL-MICRO]  7.49,46.86 0 top
FD2  FIDUCIALUFIDUCIAL  [FIDUCIAL-MICRO]  7.49,46.86 0 bottom
FD3  FIDUCIALUFIDUCIAL  [FIDUCIAL-MICRO]  16.89,7.49 0 top
FD4  FIDUCIALUFIDUCIAL  [FIDUCIAL-MICRO]  16.89,7.49 0 bottom
FD5  FIDUCIALUFIDUCIAL  [FIDUCIAL-MICRO]  18.67,46.86 0 top
FD6  FIDUCIALUFIDUCIAL  [FIDUCIAL-MICRO]  18.67,46.86 0 bottom
FD7  FIDUCIALUFIDUCIAL  [FIDUCIAL-MICRO]  28.07,7.49 0 top
FD8  FIDUCIALUFIDUCIAL  [FIDUCIAL-MICRO]  28.07,7.49 0 bottom
FD9  FIDUCIALUFIDUCIAL  [FIDUCIAL-MICRO]  29.84,46.86 0 top
FD10  FIDUCIALUFIDUCIAL  [FIDUCIAL-MICRO]  29.84,46.86 0 bottom
FD11  FIDUCIALUFIDUCIAL  [FIDUCIAL-MICRO]  39.24,7.49 0 top
FD12  FIDUCIALUFIDUCIAL  [FIDUCIAL-MICRO]  39.24,7.49 0 bottom
FD13  FIDUCIALUFIDUCIAL  [FIDUCIAL-MICRO]  41.02,46.86 0 top
FD14  FIDUCIALUFIDUCIAL  [FIDUCIAL-MICRO]  41.02,46.86 0 bottom
FD15  FIDUCIALUFIDUCIAL  [FIDUCIAL-MICRO]  50.42,7.49 0 top
FD16  FIDUCIALUFIDUCIAL  [FIDUCIAL-MICRO]  50.42,7.49 0 bottom
FD17  FIDUCIALUFIDUCIAL  [FIDUCIAL-MICRO]  52.2,46.86 0 top
FD18  FIDUCIALUFIDUCIAL  [FIDUCIAL-MICRO]  52.2,46.86 0 bottom
FD19  FIDUCIALUFIDUCIAL  [FIDUCIAL-MICRO]  61.59,7.49 0 top
FD20  FIDUCIALUFIDUCIAL  [FIDUCIAL-MICRO]  61.59,7.49 0 bottom
FD21  FIDUCIALUFIDUCIAL  [FIDUCIAL-MICRO]  63.37,46.86 0 top
FD22  FIDUCIALUFIDUCIAL  [FIDUCIAL-MICRO]  63.37,46.86 0 bottom
FD23  FIDUCIALUFIDUCIAL  [FIDUCIAL-MICRO]  72.77,7.49 0 top
FD24  FIDUCIALUFIDUCIAL  [FIDUCIAL-MICRO]  72.77,7.49 0 bottom
FD25  FIDUCIALUFIDUCIAL  [FIDUCIAL-MICRO]  74.55,46.86 0 top
FD26  FIDUCIALUFIDUCIAL  [FIDUCIAL-MICRO]  74.55,46.86 0 bottom
FD27  FIDUCIALUFIDUCIAL  [FIDUCIAL-MICRO]  83.95,7.49 0 top
FD28  FIDUCIALUFIDUCIAL  [FIDUCIAL-MICRO]  83.95,7.49 0 bottom
FD29  FIDUCIALUFIDUCIAL  [FIDUCIAL-MICRO]  85.73,46.86 0 top
FD30  FIDUCIALUFIDUCIAL  [FIDUCIAL-MICRO]  85.73,46.86 0 bottom
FD31  FIDUCIALUFIDUCIAL  [FIDUCIAL-MICRO]  95.12,7.49 0 top
FD32  FIDUCIALUFIDUCIAL  [FIDUCIAL-MICRO]  95.12,7.49 0 bottom
FD33  FIDUCIALUFIDUCIAL  [FIDUCIAL-MICRO]  96.9,46.86 0 top
FD34  FIDUCIALUFIDUCIAL  [FIDUCIAL-MICRO]  96.9,46.86 0 bottom
FD35  FIDUCIALUFIDUCIAL  [FIDUCIAL-MICRO]  106.3,7.49 0 top
FD36  FIDUCIALUFIDUCIAL  [FIDUCIAL-MICRO]  106.3,7.49 0 bottom
FD37  FIDUCIALUFIDUCIAL  [FIDUCIAL-MICRO]  108.08,46.86 0 top
FD38  FIDUCIALUFIDUCIAL  [FIDUCIAL-MICRO]  108.08,46.86 0 bottom
FD39  FIDUCIALUFIDUCIAL  [FIDUCIAL-MICRO]  117.48,7.49 0 top
FD40  FIDUCIALUFIDUCIAL  [FIDUCIAL-MICRO]  117.48,7.49 0 bottom
FD41  FIDUCIALUFIDUCIAL  [FIDUCIAL-MICRO]  119.25,46.86 0 top
FD42  FIDUCIALUFIDUCIAL  [FIDUCIAL-MICRO]  119.25,46.86 0 bottom
FD43  FIDUCIALUFIDUCIAL  [FIDUCIAL-MICRO]  128.65,7.49 0 top
FD44  FIDUCIALUFIDUCIAL  [FIDUCIAL-MICRO]  128.65,7.49 0 bottom
FD45  FIDUCIALUFIDUCIAL  [FIDUCIAL-MICRO]  130.43,46.86 0 top
FD46  FIDUCIALUFIDUCIAL  [FIDUCIAL-MICRO]  130.43,46.86 0 bottom
FD47  FIDUCIALUFIDUCIAL  [FIDUCIAL-MICRO]  139.83,7.49 0 top
FD48  FIDUCIALUFIDUCIAL  [FIDUCIAL-MICRO]  139.83,7.49 0 bottom
FD49  FIDUCIALUFIDUCIAL  [FIDUCIAL-MICRO]  141.61,46.86 0 top
FD50  FIDUCIALUFIDUCIAL  [FIDUCIAL-MICRO]  141.61,46.86 0 bottom
FD51  FIDUCIALUFIDUCIAL  [FIDUCIAL-MICRO]  151,7.49 0 top
FD52  FIDUCIALUFIDUCIAL  [FIDUCIAL-MICRO]  151,7.49 0 bottom
FD53  FIDUCIALUFIDUCIAL  [FIDUCIAL-MICRO]  152.78,46.86 0 top
FD54  FIDUCIALUFIDUCIAL  [FIDUCIAL-MICRO]  152.78,46.86 0 bottom
FD55  FIDUCIALUFIDUCIAL  [FIDUCIAL-MICRO]  162.18,7.49 0 top
FD56  FIDUCIALUFIDUCIAL  [FIDUCIAL-MICRO]  162.18,7.49 0 bottom
FD57  FIDUCIALUFIDUCIAL  [FIDUCIAL-MICRO]  163.96,46.86 0 top
FD58  FIDUCIALUFIDUCIAL  [FIDUCIAL-MICRO]  163.96,46.86 0 bottom
FD59  FIDUCIALUFIDUCIAL  [FIDUCIAL-MICRO]  173.36,7.49 0 top
FD60  FIDUCIALUFIDUCIAL  [FIDUCIAL-MICRO]  173.36,7.49 0 bottom
FD61  FIDUCIALUFIDUCIAL  [FIDUCIAL-MICRO]  175.13,46.86 0 top
FD62  FIDUCIALUFIDUCIAL  [FIDUCIAL-MICRO]  175.13,46.86 0 bottom
FD63  FIDUCIALUFIDUCIAL  [FIDUCIAL-MICRO]  184.53,7.49 0 top
FD64  FIDUCIALUFIDUCIAL  [FIDUCIAL-MICRO]  184.53,7.49 0 bottom
FD65  FIDUCIALUFIDUCIAL  [FIDUCIAL-MICRO]  7.49,88.01 0 top
FD66  FIDUCIALUFIDUCIAL  [FIDUCIAL-MICRO]  7.49,88.01 0 bottom
FD67  FIDUCIALUFIDUCIAL  [FIDUCIAL-MICRO]  16.89,48.64 0 top
FD68  FIDUCIALUFIDUCIAL  [FIDUCIAL-MICRO]  16.89,48.64 0 bottom
FD69  FIDUCIALUFIDUCIAL  [FIDUCIAL-MICRO]  18.67,88.01 0 top
FD70  FIDUCIALUFIDUCIAL  [FIDUCIAL-MICRO]  18.67,88.01 0 bottom
FD71  FIDUCIALUFIDUCIAL  [FIDUCIAL-MICRO]  28.07,48.64 0 top
FD72  FIDUCIALUFIDUCIAL  [FIDUCIAL-MICRO]  28.07,48.64 0 bottom
FD73  FIDUCIALUFIDUCIAL  [FIDUCIAL-MICRO]  29.84,88.01 0 top
FD74  FIDUCIALUFIDUCIAL  [FIDUCIAL-MICRO]  29.84,88.01 0 bottom
FD75  FIDUCIALUFIDUCIAL  [FIDUCIAL-MICRO]  39.24,48.64 0 top
FD76  FIDUCIALUFIDUCIAL  [FIDUCIAL-MICRO]  39.24,48.64 0 bottom
FD77  FIDUCIALUFIDUCIAL  [FIDUCIAL-MICRO]  41.02,88.01 0 top
FD78  FIDUCIALUFIDUCIAL  [FIDUCIAL-MICRO]  41.02,88.01 0 bottom
FD79  FIDUCIALUFIDUCIAL  [FIDUCIAL-MICRO]  50.42,48.64 0 top
FD80  FIDUCIALUFIDUCIAL  [FIDUCIAL-MICRO]  50.42,48.64 0 bottom
FD81  FIDUCIALUFIDUCIAL  [FIDUCIAL-MICRO]  52.2,88.01 0 top
FD82  FIDUCIALUFIDUCIAL  [FIDUCIAL-MICRO]  52.2,88.01 0 bottom
FD83  FIDUCIALUFIDUCIAL  [FIDUCIAL-MICRO]  61.59,48.64 0 top
FD84  FIDUCIALUFIDUCIAL  [FIDUCIAL-MICRO]  61.59,48.64 0 bottom
FD85  FIDUCIALUFIDUCIAL  [FIDUCIAL-MICRO]  63.37,88.01 0 top
FD86  FIDUCIALUFIDUCIAL  [FIDUCIAL-MICRO]  63.37,88.01 0 bottom
FD87  FIDUCIALUFIDUCIAL  [FIDUCIAL-MICRO]  72.77,48.64 0 top
FD88  FIDUCIALUFIDUCIAL  [FIDUCIAL-MICRO]  72.77,48.64 0 bottom
FD89  FIDUCIALUFIDUCIAL  [FIDUCIAL-MICRO]  74.55,88.01 0 top
FD90  FIDUCIALUFIDUCIAL  [FIDUCIAL-MICRO]  74.55,88.01 0 bottom
FD91  FIDUCIALUFIDUCIAL  [FIDUCIAL-MICRO]  83.95,48.64 0 top
FD92  FIDUCIALUFIDUCIAL  [FIDUCIAL-MICRO]  83.95,48.64 0 bottom
FD93  FIDUCIALUFIDUCIAL  [FIDUCIAL-MICRO]  85.73,88.01 0 top
FD94  FIDUCIALUFIDUCIAL  [FIDUCIAL-MICRO]  85.73,88.01 0 bottom
FD95  FIDUCIALUFIDUCIAL  [FIDUCIAL-MICRO]  95.12,48.64 0 top
FD96  FIDUCIALUFIDUCIAL  [FIDUCIAL-MICRO]  95.12,48.64 0 bottom
FD97  FIDUCIALUFIDUCIAL  [FIDUCIAL-MICRO]  96.9,88.01 0 top
FD98  FIDUCIALUFIDUCIAL  [FIDUCIAL-MICRO]  96.9,88.01 0 bottom
FD99  FIDUCIALUFIDUCIAL  [FIDUCIAL-MICRO]  106.3,48.64 0 top
FD100  FIDUCIALUFIDUCIAL  [FIDUCIAL-MICRO]  106.3,48.64 0 bottom
FD101  FIDUCIALUFIDUCIAL  [FIDUCIAL-MICRO]  108.08,88.01 0 top
FD102  FIDUCIALUFIDUCIAL  [FIDUCIAL-MICRO]  108.08,88.01 0 bottom
FD103  FIDUCIALUFIDUCIAL  [FIDUCIAL-MICRO]  117.48,48.64 0 top
FD104  FIDUCIALUFIDUCIAL  [FIDUCIAL-MICRO]  117.48,48.64 0 bottom
FD105  FIDUCIALUFIDUCIAL  [FIDUCIAL-MICRO]  119.25,88.01 0 top
FD106  FIDUCIALUFIDUCIAL  [FIDUCIAL-MICRO]  119.25,88.01 0 bottom
FD107  FIDUCIALUFIDUCIAL  [FIDUCIAL-MICRO]  128.65,48.64 0 top
FD108  FIDUCIALUFIDUCIAL  [FIDUCIAL-MICRO]  128.65,48.64 0 bottom
FD109  FIDUCIALUFIDUCIAL  [FIDUCIAL-MICRO]  130.43,88.01 0 top
FD110  FIDUCIALUFIDUCIAL  [FIDUCIAL-MICRO]  130.43,88.01 0 bottom
FD111  FIDUCIALUFIDUCIAL  [FIDUCIAL-MICRO]  139.83,48.64 0 top
FD112  FIDUCIALUFIDUCIAL  [FIDUCIAL-MICRO]  139.83,48.64 0 bottom
FD113  FIDUCIALUFIDUCIAL  [FIDUCIAL-MICRO]  141.61,88.01 0 top
FD114  FIDUCIALUFIDUCIAL  [FIDUCIAL-MICRO]  141.61,88.01 0 bottom
FD115  FIDUCIALUFIDUCIAL  [FIDUCIAL-MICRO]  151,48.64 0 top
FD116  FIDUCIALUFIDUCIAL  [FIDUCIAL-MICRO]  151,48.64 0 bottom
FD117  FIDUCIALUFIDUCIAL  [FIDUCIAL-MICRO]  152.78,88.01 0 top
FD118  FIDUCIALUFIDUCIAL  [FIDUCIAL-MICRO]  152.78,88.01 0 bottom
FD119  FIDUCIALUFIDUCIAL  [FIDUCIAL-MICRO]  162.18,48.64 0 top
FD120  FIDUCIALUFIDUCIAL  [FIDUCIAL-MICRO]  162.18,48.64 0 bottom
FD121  FIDUCIALUFIDUCIAL  [FIDUCIAL-MICRO]  163.96,88.01 0 top
FD122  FIDUCIALUFIDUCIAL  [FIDUCIAL-MICRO]  163.96,88.01 0 bottom
FD123  FIDUCIALUFIDUCIAL  [FIDUCIAL-MICRO]  173.36,48.64 0 top
FD124  FIDUCIALUFIDUCIAL  [FIDUCIAL-MICRO]  173.36,48.64 0 bottom
FD125  FIDUCIALUFIDUCIAL  [FIDUCIAL-MICRO]  175.13,88.01 0 top
FD126  FIDUCIALUFIDUCIAL  [FIDUCIAL-MICRO]  175.13,88.01 0 bottom
FD127  FIDUCIALUFIDUCIAL  [FIDUCIAL-MICRO]  184.53,48.64 0 top
FD128  FIDUCIALUFIDUCIAL  [FIDUCIAL-MICRO]  184.53,48.64 0 bottom
FD129  FIDUCIALUFIDUCIAL  [FIDUCIAL-MICRO]  7.49,129.16 0 top
FD130  FIDUCIALUFIDUCIAL  [FIDUCIAL-MICRO]  7.49,129.16 0 bottom
FD131  FIDUCIALUFIDUCIAL  [FIDUCIAL-MICRO]  16.89,89.79 0 top
FD132  FIDUCIALUFIDUCIAL  [FIDUCIAL-MICRO]  16.89,89.79 0 bottom
FD133  FIDUCIALUFIDUCIAL  [FIDUCIAL-MICRO]  18.67,129.16 0 top
FD134  FIDUCIALUFIDUCIAL  [FIDUCIAL-MICRO]  18.67,129.16 0 bottom
FD135  FIDUCIALUFIDUCIAL  [FIDUCIAL-MICRO]  28.07,89.79 0 top
FD136  FIDUCIALUFIDUCIAL  [FIDUCIAL-MICRO]  28.07,89.79 0 bottom
FD137  FIDUCIALUFIDUCIAL  [FIDUCIAL-MICRO]  29.84,129.16 0 top
FD138  FIDUCIALUFIDUCIAL  [FIDUCIAL-MICRO]  29.84,129.16 0 bottom
FD139  FIDUCIALUFIDUCIAL  [FIDUCIAL-MICRO]  39.24,89.79 0 top
FD140  FIDUCIALUFIDUCIAL  [FIDUCIAL-MICRO]  39.24,89.79 0 bottom
FD141  FIDUCIALUFIDUCIAL  [FIDUCIAL-MICRO]  41.02,129.16 0 top
FD142  FIDUCIALUFIDUCIAL  [FIDUCIAL-MICRO]  41.02,129.16 0 bottom
FD143  FIDUCIALUFIDUCIAL  [FIDUCIAL-MICRO]  50.42,89.79 0 top
FD144  FIDUCIALUFIDUCIAL  [FIDUCIAL-MICRO]  50.42,89.79 0 bottom
FD145  FIDUCIALUFIDUCIAL  [FIDUCIAL-MICRO]  52.2,129.16 0 top
FD146  FIDUCIALUFIDUCIAL  [FIDUCIAL-MICRO]  52.2,129.16 0 bottom
FD147  FIDUCIALUFIDUCIAL  [FIDUCIAL-MICRO]  61.59,89.79 0 top
FD148  FIDUCIALUFIDUCIAL  [FIDUCIAL-MICRO]  61.59,89.79 0 bottom
FD149  FIDUCIALUFIDUCIAL  [FIDUCIAL-MICRO]  63.37,129.16 0 top
FD150  FIDUCIALUFIDUCIAL  [FIDUCIAL-MICRO]  63.37,129.16 0 bottom
FD151  FIDUCIALUFIDUCIAL  [FIDUCIAL-MICRO]  72.77,89.79 0 top
FD152  FIDUCIALUFIDUCIAL  [FIDUCIAL-MICRO]  72.77,89.79 0 bottom
FD153  FIDUCIALUFIDUCIAL  [FIDUCIAL-MICRO]  74.55,129.16 0 top
FD154  FIDUCIALUFIDUCIAL  [FIDUCIAL-MICRO]  74.55,129.16 0 bottom
FD155  FIDUCIALUFIDUCIAL  [FIDUCIAL-MICRO]  83.95,89.79 0 top
FD156  FIDUCIALUFIDUCIAL  [FIDUCIAL-MICRO]  83.95,89.79 0 bottom
FD157  FIDUCIALUFIDUCIAL  [FIDUCIAL-MICRO]  85.73,129.16 0 top
FD158  FIDUCIALUFIDUCIAL  [FIDUCIAL-MICRO]  85.73,129.16 0 bottom
FD159  FIDUCIALUFIDUCIAL  [FIDUCIAL-MICRO]  95.12,89.79 0 top
FD160  FIDUCIALUFIDUCIAL  [FIDUCIAL-MICRO]  95.12,89.79 0 bottom
FD161  FIDUCIALUFIDUCIAL  [FIDUCIAL-MICRO]  96.9,129.16 0 top
FD162  FIDUCIALUFIDUCIAL  [FIDUCIAL-MICRO]  96.9,129.16 0 bottom
FD163  FIDUCIALUFIDUCIAL  [FIDUCIAL-MICRO]  106.3,89.79 0 top
FD164  FIDUCIALUFIDUCIAL  [FIDUCIAL-MICRO]  106.3,89.79 0 bottom
FD165  FIDUCIALUFIDUCIAL  [FIDUCIAL-MICRO]  108.08,129.16 0 top
FD166  FIDUCIALUFIDUCIAL  [FIDUCIAL-MICRO]  108.08,129.16 0 bottom
FD167  FIDUCIALUFIDUCIAL  [FIDUCIAL-MICRO]  117.48,89.79 0 top
FD168  FIDUCIALUFIDUCIAL  [FIDUCIAL-MICRO]  117.48,89.79 0 bottom
FD169  FIDUCIALUFIDUCIAL  [FIDUCIAL-MICRO]  119.25,129.16 0 top
FD170  FIDUCIALUFIDUCIAL  [FIDUCIAL-MICRO]  119.25,129.16 0 bottom
FD171  FIDUCIALUFIDUCIAL  [FIDUCIAL-MICRO]  128.65,89.79 0 top
FD172  FIDUCIALUFIDUCIAL  [FIDUCIAL-MICRO]  128.65,89.79 0 bottom
FD173  FIDUCIALUFIDUCIAL  [FIDUCIAL-MICRO]  130.43,129.16 0 top
FD174  FIDUCIALUFIDUCIAL  [FIDUCIAL-MICRO]  130.43,129.16 0 bottom
FD175  FIDUCIALUFIDUCIAL  [FIDUCIAL-MICRO]  139.83,89.79 0 top
FD176  FIDUCIALUFIDUCIAL  [FIDUCIAL-MICRO]  139.83,89.79 0 bottom
FD177  FIDUCIALUFIDUCIAL  [FIDUCIAL-MICRO]  141.61,129.16 0 top
FD178  FIDUCIALUFIDUCIAL  [FIDUCIAL-MICRO]  141.61,129.16 0 bottom
FD179  FIDUCIALUFIDUCIAL  [FIDUCIAL-MICRO]  151,89.79 0 top
FD180  FIDUCIALUFIDUCIAL  [FIDUCIAL-MICRO]  151,89.79 0 bottom
FD181  FIDUCIALUFIDUCIAL  [FIDUCIAL-MICRO]  152.78,129.16 0 top
FD182  FIDUCIALUFIDUCIAL  [FIDUCIAL-MICRO]  152.78,129.16 0 bottom
FD183  FIDUCIALUFIDUCIAL  [FIDUCIAL-MICRO]  162.18,89.79 0 top
FD184  FIDUCIALUFIDUCIAL  [FIDUCIAL-MICRO]  162.18,89.79 0 bottom
FD185  FIDUCIALUFIDUCIAL  [FIDUCIAL-MICRO]  163.96,129.16 0 top
FD186  FIDUCIALUFIDUCIAL  [FIDUCIAL-MICRO]  163.96,129.16 0 bottom
FD187  FIDUCIALUFIDUCIAL  [FIDUCIAL-MICRO]  173.36,89.79 0 top
FD188  FIDUCIALUFIDUCIAL  [FIDUCIAL-MICRO]  173.36,89.79 0 bottom
FD189  FIDUCIALUFIDUCIAL  [FIDUCIAL-MICRO]  175.13,129.16 0 top
FD190  FIDUCIALUFIDUCIAL  [FIDUCIAL-MICRO]  175.13,129.16 0 bottom
FD191  FIDUCIALUFIDUCIAL  [FIDUCIAL-MICRO]  184.53,89.79 0 top
FD192  FIDUCIALUFIDUCIAL  [FIDUCIAL-MICRO]  184.53,89.79 0 bottom
IN  [FPC_16_0.5MM]  12.19,45.4 0 bottom
IN1  [FPC_16_0.5MM]  23.37,45.4 0 bottom
IN2  [FPC_16_0.5MM]  34.54,45.4 0 bottom
IN3  [FPC_16_0.5MM]  45.72,45.4 0 bottom
IN4  [FPC_16_0.5MM]  56.9,45.4 0 bottom
IN5  [FPC_16_0.5MM]  68.07,45.4 0 bottom
IN6  [FPC_16_0.5MM]  79.25,45.4 0 bottom
IN7  [FPC_16_0.5MM]  90.42,45.4 0 bottom
IN8  [FPC_16_0.5MM]  101.6,45.4 0 bottom
IN9  [FPC_16_0.5MM]  112.78,45.4 0 bottom
IN10  [FPC_16_0.5MM]  123.95,45.4 0 bottom
IN11  [FPC_16_0.5MM]  135.13,45.4 0 bottom
IN12  [FPC_16_0.5MM]  146.3,45.4 0 bottom
IN13  [FPC_16_0.5MM]  157.48,45.4 0 bottom
IN14  [FPC_16_0.5MM]  168.66,45.4 0 bottom
IN15  [FPC_16_0.5MM]  179.83,45.4 0 bottom
IN16  [FPC_16_0.5MM]  12.19,86.55 0 bottom
IN17  [FPC_16_0.5MM]  23.37,86.55 0 bottom
IN18  [FPC_16_0.5MM]  34.54,86.55 0 bottom
IN19  [FPC_16_0.5MM]  45.72,86.55 0 bottom
IN20  [FPC_16_0.5MM]  56.9,86.55 0 bottom
IN21  [FPC_16_0.5MM]  68.07,86.55 0 bottom
IN22  [FPC_16_0.5MM]  79.25,86.55 0 bottom
IN23  [FPC_16_0.5MM]  90.42,86.55 0 bottom
IN24  [FPC_16_0.5MM]  101.6,86.55 0 bottom
IN25  [FPC_16_0.5MM]  112.78,86.55 0 bottom
IN26  [FPC_16_0.5MM]  123.95,86.55 0 bottom
IN27  [FPC_16_0.5MM]  135.13,86.55 0 bottom
IN28  [FPC_16_0.5MM]  146.3,86.55 0 bottom
IN29  [FPC_16_0.5MM]  157.48,86.55 0 bottom
IN30  [FPC_16_0.5MM]  168.66,86.55 0 bottom
IN31  [FPC_16_0.5MM]  179.83,86.55 0 bottom
IN32  [FPC_16_0.5MM]  12.19,127.7 0 bottom
IN33  [FPC_16_0.5MM]  23.37,127.7 0 bottom
IN34  [FPC_16_0.5MM]  34.54,127.7 0 bottom
IN35  [FPC_16_0.5MM]  45.72,127.7 0 bottom
IN36  [FPC_16_0.5MM]  56.9,127.7 0 bottom
IN37  [FPC_16_0.5MM]  68.07,127.7 0 bottom
IN38  [FPC_16_0.5MM]  79.25,127.7 0 bottom
IN39  [FPC_16_0.5MM]  90.42,127.7 0 bottom
IN40  [FPC_16_0.5MM]  101.6,127.7 0 bottom
IN41  [FPC_16_0.5MM]  112.78,127.7 0 bottom
IN42  [FPC_16_0.5MM]  123.95,127.7 0 bottom
IN43  [FPC_16_0.5MM]  135.13,127.7 0 bottom
IN44  [FPC_16_0.5MM]  146.3,127.7 0 bottom
IN45  [FPC_16_0.5MM]  157.48,127.7 0 bottom
IN46  [FPC_16_0.5MM]  168.66,127.7 0 bottom
IN47  [FPC_16_0.5MM]  179.83,127.7 0 bottom
J1  [JST-2-SMD]  12.19,44.01 0 top
J2  [JST-2-SMD]  23.37,44.01 0 top
J3  AVR_SPI_PROG_3X2TESTPOINTS  [2X3_TEST_POINTS]  12.19,27.18 0 bottom
J4  AVR_SPI_PROG_3X2TESTPOINTS  [2X3_TEST_POINTS]  23.37,27.18 0 bottom
J5  [JST-2-SMD]  34.54,44.01 0 top
J6  AVR_SPI_PROG_3X2TESTPOINTS  [2X3_TEST_POINTS]  34.54,27.18 0 bottom
J7  [JST-2-SMD]  45.72,44.01 0 top
J8  AVR_SPI_PROG_3X2TESTPOINTS  [2X3_TEST_POINTS]  45.72,27.18 0 bottom
J9  [JST-2-SMD]  56.9,44.01 0 top
J10  AVR_SPI_PROG_3X2TESTPOINTS  [2X3_TEST_POINTS]  56.9,27.18 0 bottom
J11  [JST-2-SMD]  68.07,44.01 0 top
J12  AVR_SPI_PROG_3X2TESTPOINTS  [2X3_TEST_POINTS]  68.07,27.18 0 bottom
J13  [JST-2-SMD]  79.25,44.01 0 top
J14  AVR_SPI_PROG_3X2TESTPOINTS  [2X3_TEST_POINTS]  79.25,27.18 0 bottom
J15  [JST-2-SMD]  90.42,44.01 0 top
J16  AVR_SPI_PROG_3X2TESTPOINTS  [2X3_TEST_POINTS]  90.42,27.18 0 bottom
J17  [JST-2-SMD]  101.6,44.01 0 top
J18  AVR_SPI_PROG_3X2TESTPOINTS  [2X3_TEST_POINTS]  101.6,27.18 0 bottom
J19  [JST-2-SMD]  112.78,44.01 0 top
J20  AVR_SPI_PROG_3X2TESTPOINTS  [2X3_TEST_POINTS]  112.78,27.18 0 bottom
J21  [JST-2-SMD]  123.95,44.01 0 top
J22  AVR_SPI_PROG_3X2TESTPOINTS  [2X3_TEST_POINTS]  123.95,27.18 0 bottom
J23  [JST-2-SMD]  135.13,44.01 0 top
J24  AVR_SPI_PROG_3X2TESTPOINTS  [2X3_TEST_POINTS]  135.13,27.18 0 bottom
J25  [JST-2-SMD]  146.3,44.01 0 top
J26  AVR_SPI_PROG_3X2TESTPOINTS  [2X3_TEST_POINTS]  146.3,27.18 0 bottom
J27  [JST-2-SMD]  157.48,44.01 0 top
J28  AVR_SPI_PROG_3X2TESTPOINTS  [2X3_TEST_POINTS]  157.48,27.18 0 bottom
J29  [JST-2-SMD]  168.66,44.01 0 top
J30  AVR_SPI_PROG_3X2TESTPOINTS  [2X3_TEST_POINTS]  168.66,27.18 0 bottom
J31  [JST-2-SMD]  179.83,44.01 0 top
J32  AVR_SPI_PROG_3X2TESTPOINTS  [2X3_TEST_POINTS]  179.83,27.18 0 bottom
J33  [JST-2-SMD]  12.19,85.15 0 top
J34  AVR_SPI_PROG_3X2TESTPOINTS  [2X3_TEST_POINTS]  12.19,68.33 0 bottom
J35  [JST-2-SMD]  23.37,85.15 0 top
J36  AVR_SPI_PROG_3X2TESTPOINTS  [2X3_TEST_POINTS]  23.37,68.33 0 bottom
J37  [JST-2-SMD]  34.54,85.15 0 top
J38  AVR_SPI_PROG_3X2TESTPOINTS  [2X3_TEST_POINTS]  34.54,68.33 0 bottom
J39  [JST-2-SMD]  45.72,85.15 0 top
J40  AVR_SPI_PROG_3X2TESTPOINTS  [2X3_TEST_POINTS]  45.72,68.33 0 bottom
J41  [JST-2-SMD]  56.9,85.15 0 top
J42  AVR_SPI_PROG_3X2TESTPOINTS  [2X3_TEST_POINTS]  56.9,68.33 0 bottom
J43  [JST-2-SMD]  68.07,85.15 0 top
J44  AVR_SPI_PROG_3X2TESTPOINTS  [2X3_TEST_POINTS]  68.07,68.33 0 bottom
J45  [JST-2-SMD]  79.25,85.15 0 top
J46  AVR_SPI_PROG_3X2TESTPOINTS  [2X3_TEST_POINTS]  79.25,68.33 0 bottom
J47  [JST-2-SMD]  90.42,85.15 0 top
J48  AVR_SPI_PROG_3X2TESTPOINTS  [2X3_TEST_POINTS]  90.42,68.33 0 bottom
J49  [JST-2-SMD]  101.6,85.15 0 top
J50  AVR_SPI_PROG_3X2TESTPOINTS  [2X3_TEST_POINTS]  101.6,68.33 0 bottom
J51  [JST-2-SMD]  112.78,85.15 0 top
J52  AVR_SPI_PROG_3X2TESTPOINTS  [2X3_TEST_POINTS]  112.78,68.33 0 bottom
J53  [JST-2-SMD]  123.95,85.15 0 top
J54  AVR_SPI_PROG_3X2TESTPOINTS  [2X3_TEST_POINTS]  123.95,68.33 0 bottom
J55  [JST-2-SMD]  135.13,85.15 0 top
J56  AVR_SPI_PROG_3X2TESTPOINTS  [2X3_TEST_POINTS]  135.13,68.33 0 bottom
J57  [JST-2-SMD]  146.3,85.15 0 top
J58  AVR_SPI_PROG_3X2TESTPOINTS  [2X3_TEST_POINTS]  146.3,68.33 0 bottom
J59  [JST-2-SMD]  157.48,85.15 0 top
J60  AVR_SPI_PROG_3X2TESTPOINTS  [2X3_TEST_POINTS]  157.48,68.33 0 bottom
J61  [JST-2-SMD]  168.66,85.15 0 top
J62  AVR_SPI_PROG_3X2TESTPOINTS  [2X3_TEST_POINTS]  168.66,68.33 0 bottom
J63  [JST-2-SMD]  179.83,85.15 0 top
J64  AVR_SPI_PROG_3X2TESTPOINTS  [2X3_TEST_POINTS]  179.83,68.33 0 bottom
J65  [JST-2-SMD]  12.19,126.3 0 top
J66  AVR_SPI_PROG_3X2TESTPOINTS  [2X3_TEST_POINTS]  12.19,109.47 0 bottom
J67  [JST-2-SMD]  23.37,126.3 0 top
J68  AVR_SPI_PROG_3X2TESTPOINTS  [2X3_TEST_POINTS]  23.37,109.47 0 bottom
J69  [JST-2-SMD]  34.54,126.3 0 top
J70  AVR_SPI_PROG_3X2TESTPOINTS  [2X3_TEST_POINTS]  34.54,109.47 0 bottom
J71  [JST-2-SMD]  45.72,126.3 0 top
J72  AVR_SPI_PROG_3X2TESTPOINTS  [2X3_TEST_POINTS]  45.72,109.47 0 bottom
J73  [JST-2-SMD]  56.9,126.3 0 top
J74  AVR_SPI_PROG_3X2TESTPOINTS  [2X3_TEST_POINTS]  56.9,109.47 0 bottom
J75  [JST-2-SMD]  68.07,126.3 0 top
J76  AVR_SPI_PROG_3X2TESTPOINTS  [2X3_TEST_POINTS]  68.07,109.47 0 bottom
J77  [JST-2-SMD]  79.25,126.3 0 top
J78  AVR_SPI_PROG_3X2TESTPOINTS  [2X3_TEST_POINTS]  79.25,109.47 0 bottom
J79  [JST-2-SMD]  90.42,126.3 0 top
J80  AVR_SPI_PROG_3X2TESTPOINTS  [2X3_TEST_POINTS]  90.42,109.47 0 bottom
J81  [JST-2-SMD]  101.6,126.3 0 top
J82  AVR_SPI_PROG_3X2TESTPOINTS  [2X3_TEST_POINTS]  101.6,109.47 0 bottom
J83  [JST-2-SMD]  112.78,126.3 0 top
J84  AVR_SPI_PROG_3X2TESTPOINTS  [2X3_TEST_POINTS]  112.78,109.47 0 bottom
J85  [JST-2-SMD]  123.95,126.3 0 top
J86  AVR_SPI_PROG_3X2TESTPOINTS  [2X3_TEST_POINTS]  123.95,109.47 0 bottom
J87  [JST-2-SMD]  135.13,126.3 0 top
J88  AVR_SPI_PROG_3X2TESTPOINTS  [2X3_TEST_POINTS]  135.13,109.47 0 bottom
J89  [JST-2-SMD]  146.3,126.3 0 top
J90  AVR_SPI_PROG_3X2TESTPOINTS  [2X3_TEST_POINTS]  146.3,109.47 0 bottom
J91  [JST-2-SMD]  157.48,126.3 0 top
J92  AVR_SPI_PROG_3X2TESTPOINTS  [2X3_TEST_POINTS]  157.48,109.47 0 bottom
J93  [JST-2-SMD]  168.66,126.3 0 top
J94  AVR_SPI_PROG_3X2TESTPOINTS  [2X3_TEST_POINTS]  168.66,109.47 0 bottom
J95  [JST-2-SMD]  179.83,126.3 0 top
J96  AVR_SPI_PROG_3X2TESTPOINTS  [2X3_TEST_POINTS]  179.83,109.47 0 bottom
L1  15uH  [INDUCTOR_LQH32]  14.67,30.1 90 top
L2  4.7μH  [INDUCTOR_4X4MM]  12.19,22.73 270 top
L3  15uH  [INDUCTOR_LQH32]  25.84,30.1 90 top
L4  4.7μH  [INDUCTOR_4X4MM]  23.37,22.73 270 top
L5  15uH  [INDUCTOR_LQH32]  37.02,30.1 90 top
L6  4.7μH  [INDUCTOR_4X4MM]  34.54,22.73 270 top
L7  15uH  [INDUCTOR_LQH32]  48.2,30.1 90 top
L8  4.7μH  [INDUCTOR_4X4MM]  45.72,22.73 270 top
L9  15uH  [INDUCTOR_LQH32]  59.37,30.1 90 top
L10  4.7μH  [INDUCTOR_4X4MM]  56.9,22.73 270 top
L11  15uH  [INDUCTOR_LQH32]  70.55,30.1 90 top
L12  4.7μH  [INDUCTOR_4X4MM]  68.07,22.73 270 top
L13  15uH  [INDUCTOR_LQH32]  81.72,30.1 90 top
L14  4.7μH  [INDUCTOR_4X4MM]  79.25,22.73 270 top
L15  15uH  [INDUCTOR_LQH32]  92.9,30.1 90 top
L16  4.7μH  [INDUCTOR_4X4MM]  90.42,22.73 270 top
L17  15uH  [INDUCTOR_LQH32]  104.08,30.1 90 top
L18  4.7μH  [INDUCTOR_4X4MM]  101.6,22.73 270 top
L19  15uH  [INDUCTOR_LQH32]  115.25,30.1 90 top
L20  4.7μH  [INDUCTOR_4X4MM]  112.78,22.73 270 top
L21  15uH  [INDUCTOR_LQH32]  126.43,30.1 90 top
L22  4.7μH  [INDUCTOR_4X4MM]  123.95,22.73 270 top
L23  15uH  [INDUCTOR_LQH32]  137.6,30.1 90 top
L24  4.7μH  [INDUCTOR_4X4MM]  135.13,22.73 270 top
L25  15uH  [INDUCTOR_LQH32]  148.78,30.1 90 top
L26  4.7μH  [INDUCTOR_4X4MM]  146.3,22.73 270 top
L27  15uH  [INDUCTOR_LQH32]  159.96,30.1 90 top
L28  4.7μH  [INDUCTOR_4X4MM]  157.48,22.73 270 top
L29  15uH  [INDUCTOR_LQH32]  171.13,30.1 90 top
L30  4.7μH  [INDUCTOR_4X4MM]  168.66,22.73 270 top
L31  15uH  [INDUCTOR_LQH32]  182.31,30.1 90 top
L32  4.7μH  [INDUCTOR_4X4MM]  179.83,22.73 270 top
L33  15uH  [INDUCTOR_LQH32]  14.67,71.25 90 top
L34  4.7μH  [INDUCTOR_4X4MM]  12.19,63.88 270 top
L35  15uH  [INDUCTOR_LQH32]  25.84,71.25 90 top
L36  4.7μH  [INDUCTOR_4X4MM]  23.37,63.88 270 top
L37  15uH  [INDUCTOR_LQH32]  37.02,71.25 90 top
L38  4.7μH  [INDUCTOR_4X4MM]  34.54,63.88 270 top
L39  15uH  [INDUCTOR_LQH32]  48.2,71.25 90 top
L40  4.7μH  [INDUCTOR_4X4MM]  45.72,63.88 270 top
L41  15uH  [INDUCTOR_LQH32]  59.37,71.25 90 top
L42  4.7μH  [INDUCTOR_4X4MM]  56.9,63.88 270 top
L43  15uH  [INDUCTOR_LQH32]  70.55,71.25 90 top
L44  4.7μH  [INDUCTOR_4X4MM]  68.07,63.88 270 top
L45  15uH  [INDUCTOR_LQH32]  81.72,71.25 90 top
L46  4.7μH  [INDUCTOR_4X4MM]  79.25,63.88 270 top
L47  15uH  [INDUCTOR_LQH32]  92.9,71.25 90 top
L48  4.7μH  [INDUCTOR_4X4MM]  90.42,63.88 270 top
L49  15uH  [INDUCTOR_LQH32]  104.08,71.25 90 top
L50  4.7μH  [INDUCTOR_4X4MM]  101.6,63.88 270 top
L51  15uH  [INDUCTOR_LQH32]  115.25,71.25 90 top
L52  4.7μH  [INDUCTOR_4X4MM]  112.78,63.88 270 top
L53  15uH  [INDUCTOR_LQH32]  126.43,71.25 90 top
L54  4.7μH  [INDUCTOR_4X4MM]  123.95,63.88 270 top
L55  15uH  [INDUCTOR_LQH32]  137.6,71.25 90 top
L56  4.7μH  [INDUCTOR_4X4MM]  135.13,63.88 270 top
L57  15uH  [INDUCTOR_LQH32]  148.78,71.25 90 top
L58  4.7μH  [INDUCTOR_4X4MM]  146.3,63.88 270 top
L59  15uH  [INDUCTOR_LQH32]  159.96,71.25 90 top
L60  4.7μH  [INDUCTOR_4X4MM]  157.48,63.88 270 top
L61  15uH  [INDUCTOR_LQH32]  171.13,71.25 90 top
L62  4.7μH  [INDUCTOR_4X4MM]  168.66,63.88 270 top
L63  15uH  [INDUCTOR_LQH32]  182.31,71.25 90 top
L64  4.7μH  [INDUCTOR_4X4MM]  179.83,63.88 270 top
L65  15uH  [INDUCTOR_LQH32]  14.67,112.4 90 top
L66  4.7μH  [INDUCTOR_4X4MM]  12.19,105.03 270 top
L67  15uH  [INDUCTOR_LQH32]  25.84,112.4 90 top
L68  4.7μH  [INDUCTOR_4X4MM]  23.37,105.03 270 top
L69  15uH  [INDUCTOR_LQH32]  37.02,112.4 90 top
L70  4.7μH  [INDUCTOR_4X4MM]  34.54,105.03 270 top
L71  15uH  [INDUCTOR_LQH32]  48.2,112.4 90 top
L72  4.7μH  [INDUCTOR_4X4MM]  45.72,105.03 270 top
L73  15uH  [INDUCTOR_LQH32]  59.37,112.4 90 top
L74  4.7μH  [INDUCTOR_4X4MM]  56.9,105.03 270 top
L75  15uH  [INDUCTOR_LQH32]  70.55,112.4 90 top
L76  4.7μH  [INDUCTOR_4X4MM]  68.07,105.03 270 top
L77  15uH  [INDUCTOR_LQH32]  81.72,112.4 90 top
L78  4.7μH  [INDUCTOR_4X4MM]  79.25,105.03 270 top
L79  15uH  [INDUCTOR_LQH32]  92.9,112.4 90 top
L80  4.7μH  [INDUCTOR_4X4MM]  90.42,105.03 270 top
L81  15uH  [INDUCTOR_LQH32]  104.08,112.4 90 top
L82  4.7μH  [INDUCTOR_4X4MM]  101.6,105.03 270 top
L83  15uH  [INDUCTOR_LQH32]  115.25,112.4 90 top
L84  4.7μH  [INDUCTOR_4X4MM]  112.78,105.03 270 top
L85  15uH  [INDUCTOR_LQH32]  126.43,112.4 90 top
L86  4.7μH  [INDUCTOR_4X4MM]  123.95,105.03 270 top
L87  15uH  [INDUCTOR_LQH32]  137.6,112.4 90 top
L88  4.7μH  [INDUCTOR_4X4MM]  135.13,105.03 270 top
L89  15uH  [INDUCTOR_LQH32]  148.78,112.4 90 top
L90  4.7μH  [INDUCTOR_4X4MM]  146.3,105.03 270 top
L91  15uH  [INDUCTOR_LQH32]  159.96,112.4 90 top
L92  4.7μH  [INDUCTOR_4X4MM]  157.48,105.03 270 top
L93  15uH  [INDUCTOR_LQH32]  171.13,112.4 90 top
L94  4.7μH  [INDUCTOR_4X4MM]  168.66,105.03 270 top
L95  15uH  [INDUCTOR_LQH32]  182.31,112.4 90 top
L96  4.7μH  [INDUCTOR_4X4MM]  179.83,105.03 270 top
LOGO1  OSHW-LOGOMINI  [OSHW-LOGO-MINI]  27.37,27.18 90 top
LOGO2  OSHW-LOGOMINI  [OSHW-LOGO-MINI]  16.19,27.18 90 top
LOGO3  OSHW-LOGOMINI  [OSHW-LOGO-MINI]  12.19,30.35 0 bottom